# EAGLE board ADC_Block_Giant_Panel_v20 (EAGLE 7.3.0), part 1 of 13
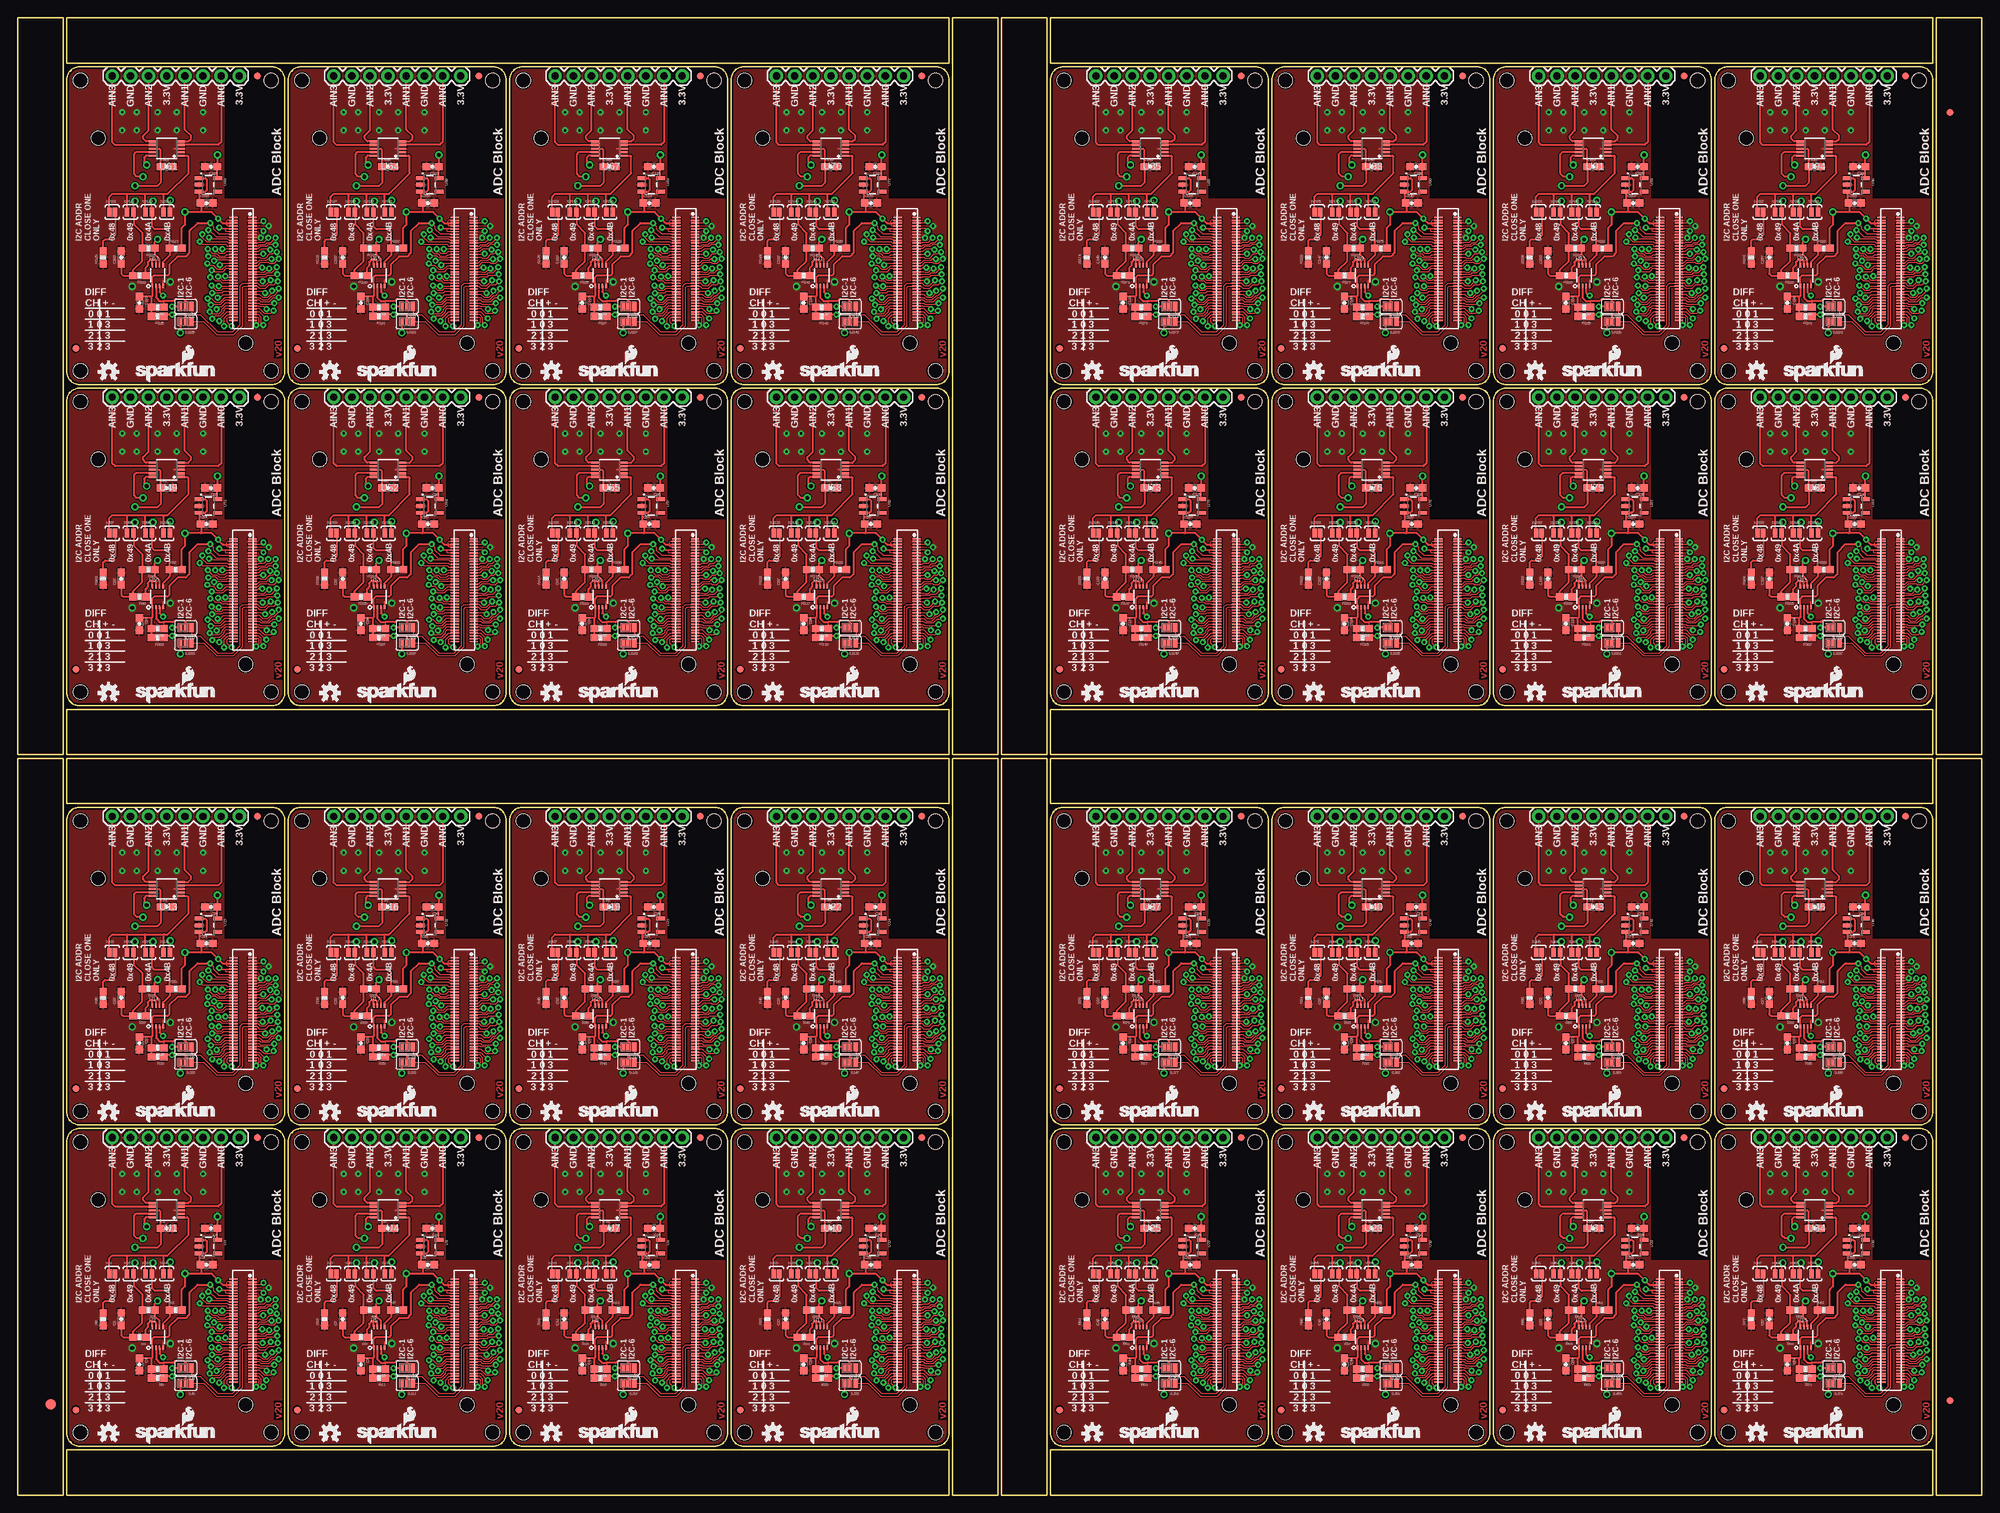
[diagram p0: board, top side]
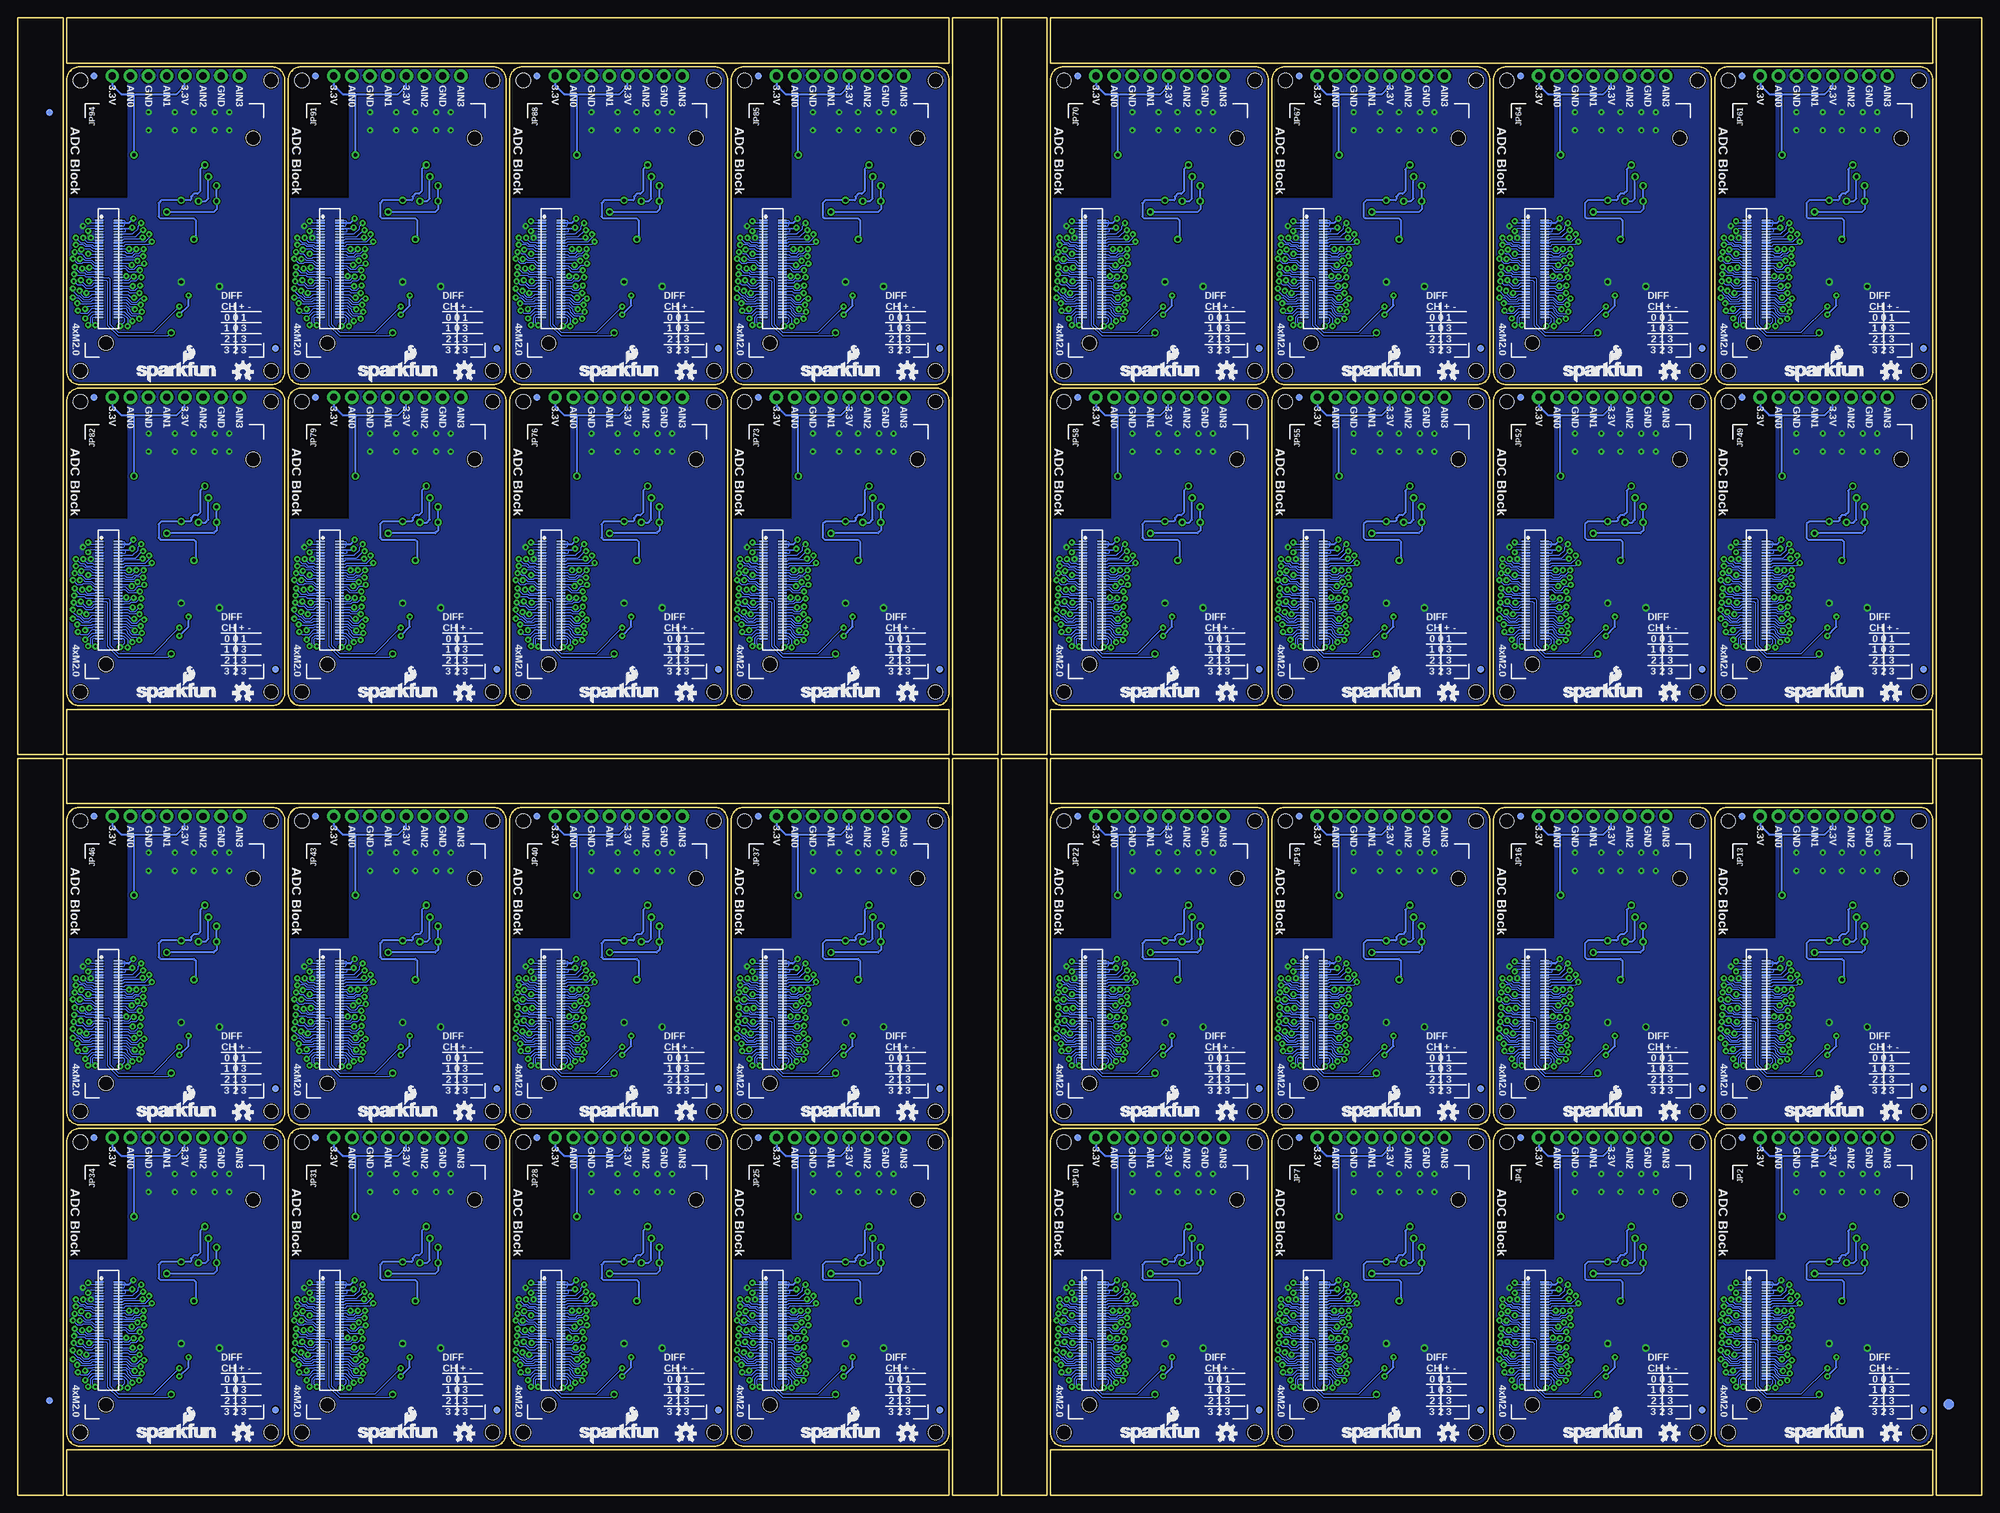
[diagram p1: board, bottom side, seen from below]

Size 274.83 x 206.76 mm. Coordinates in mm from the lower left corner, seen from the top.
Outline: 336 segments
Copper layers (1*16): Top 0.035mm / dielectric 1.5mm / Bottom 0.035mm
Design rules "SparkFun-2-layer *": minimum track width 6mil, minimum drill 13mil, track to track 6mil, track to pad 6mil, pad to pad 6mil, via to via 6mil, smd to smd 6mil, copper to edge 8mil, drill to drill 8mil, minimum pad ring 6mil, minimum via ring 10mil, stop-mask expansion 4mil, vias tented up to drill 20mil, thermal gap 8mil
Holes 2 mm at 35.43,8.76 8.76,8.76 8.76,49.4 35.43,49.4 66.42,8.76 39.75,8.76 39.75,49.4 66.42,49.4 97.41,8.76 70.74,8.76 70.74,49.4 97.41,49.4 128.4,8.76 101.73,8.76 101.73,49.4 128.4,49.4 35.43,53.72 8.76,53.72 8.76,94.36 35.43,94.36 66.42,53.72 39.75,53.72 39.75,94.36 66.42,94.36 97.41,53.72 70.74,53.72 70.74,94.36 97.41,94.36 128.4,53.72 101.73,53.72 101.73,94.36 128.4,94.36 173.1,8.76 146.43,8.76 146.43,49.4 173.1,49.4 204.09,8.76 177.42,8.76 177.42,49.4 204.09,49.4 235.08,8.76 208.41,8.76 208.41,49.4 235.08,49.4 266.06,8.76 239.4,8.76 239.4,49.4 266.06,49.4 173.1,53.72 146.43,53.72 146.43,94.36 173.1,94.36 204.09,53.72 177.42,53.72 177.42,94.36 204.09,94.36 235.08,53.72 208.41,53.72 208.41,94.36 235.08,94.36 266.06,53.72 239.4,53.72 239.4,94.36 266.06,94.36 35.43,112.39 8.76,112.39 8.76,153.03 35.43,153.03 66.42,112.39 39.75,112.39 39.75,153.03 66.42,153.03 97.41,112.39 70.74,112.39 70.74,153.03 97.41,153.03 128.4,112.39 101.73,112.39 101.73,153.03 128.4,153.03 35.43,157.35 8.76,157.35 8.76,197.99 35.43,197.99 66.42,157.35 39.75,157.35 39.75,197.99 66.42,197.99 97.41,157.35 70.74,157.35 70.74,197.99 97.41,197.99 128.4,157.35 101.73,157.35 101.73,197.99 128.4,197.99 173.1,112.39 146.43,112.39 146.43,153.03 173.1,153.03 204.09,112.39 177.42,112.39 177.42,153.03 204.09,153.03 235.08,112.39 208.41,112.39 208.41,153.03 235.08,153.03 266.06,112.39 239.4,112.39 239.4,153.03 266.06,153.03 173.1,157.35 146.43,157.35 146.43,197.99 173.1,197.99 204.09,157.35 177.42,157.35 177.42,197.99 204.09,197.99 235.08,157.35 208.41,157.35 208.41,197.99 235.08,197.99 266.06,157.35 239.4,157.35 239.4,197.99 266.06,197.99
tRestrict: area 29,33 to 37.3,51.3; area 59.9,33 to 68.3,51.3; area 90.9,33 to 99.3,51.3; area 121.9,33 to 130.3,51.3; area 29,78 to 37.3,96.3; area 59.9,78 to 68.3,96.3; area 90.9,78 to 99.3,96.3; area 121.9,78 to 130.3,96.3; area 166.6,33 to 175,51.3; area 197.6,33 to 206,51.3; area 228.6,33 to 237,51.3; area 259.6,33 to 268,51.3; 20 more areas; 64 lines
bRestrict: area 29,33 to 37.3,51.3; area 59.9,33 to 68.3,51.3; area 90.9,33 to 99.3,51.3; area 121.9,33 to 130.3,51.3; area 29,78 to 37.3,96.3; area 59.9,78 to 68.3,96.3; area 90.9,78 to 99.3,96.3; area 121.9,78 to 130.3,96.3; area 166.6,33 to 175,51.3; area 197.6,33 to 206,51.3; area 228.6,33 to 237,51.3; area 259.6,33 to 268,51.3; 20 more areas

## Footprints (pad centres in the part's own frame; a part is rotated, then mirrored left to right if it is on the bottom)
0603-CAP = smd 1.1 x 1: 1 -0.85,0; 2 0.85,0
FIDUCIAL-1.5X3 = smd 1.5 x 1.5: 1 0,0
FIDUCIAL-1X2 = smd 1 x 1: 1 0,0
1X08_ROUND = drill 1.016 pad 1.88: 1 0,0; 2 2.54,0; 3 5.08,0; 4 7.62,0; 5 10.16,0; 6 12.7,0; 7 15.24,0; 8 17.78,0
EDISON_DAUGHTER = smd 1.14 x 0.2: 1 1.98,19.17; 2 4.62,19.17; 3 1.98,18.77; 4 4.62,18.77; 5 1.98,18.37; 6 4.62,18.37; 7 1.98,17.97; 8 4.62,17.97; 9 1.98,17.57; 10 4.62,17.57; 11 1.98,17.17; 12 4.62,17.17; 13 1.98,16.77; 14 4.62,16.77; 15 1.98,16.37; 16 4.62,16.37; 17 1.98,15.97; 18 4.62,15.97; 19 1.98,15.57; 20 4.62,15.57; 21 1.98,15.17; 22 4.62,15.17; 23 1.98,14.77; 24 4.62,14.77; 25 1.98,14.37; 26 4.62,14.37; 27 1.98,13.97; 28 4.62,13.97; 29 1.98,13.57; 30 4.62,13.57; 31 1.98,13.17; 32 4.62,13.17; 33 1.98,12.77; 34 4.62,12.77; 35 1.98,12.37; 36 4.62,12.37; 37 1.98,11.97; 38 4.62,11.97; 39 1.98,11.57; 40 4.62,11.57; 41 1.98,11.17; 42 4.62,11.17; 43 1.98,10.77; 44 4.62,10.77; 45 1.98,10.37; 46 4.62,10.37; 47 1.98,9.97; 48 4.62,9.97; 49 1.98,9.57; 50 4.62,9.57; 51 1.98,9.17; 52 4.62,9.17; 53 1.98,8.77; 54 4.62,8.77; 55 1.98,8.37; 56 4.62,8.37; 57 1.98,7.97; 58 4.62,7.97; 59 1.98,7.57; 60 4.62,7.57; 61 1.98,7.17; 62 4.62,7.17; 63 1.98,6.77; 64 4.62,6.77; 65 1.98,6.37; 66 4.62,6.37; 67 1.98,5.97; 68 4.62,5.97; 69 1.98,5.57; 70 4.62,5.57 | hole 2: 23.53,30.67; 2.93,1.98
DF40C-70DP-0.4(51) = smd 0.2 x 1.14 bottom: 1 6.8,1.32; 2 6.8,-1.32; 3 6.4,1.32; 4 6.4,-1.32; 5 6,1.32; 6 6,-1.32; 7 5.6,1.32; 8 5.6,-1.32; 9 5.2,1.32; 10 5.2,-1.32; 11 4.8,1.32; 12 4.8,-1.32; 13 4.4,1.32; 14 4.4,-1.32; 15 4,1.32; 16 4,-1.32; 17 3.6,1.32; 18 3.6,-1.32; 19 3.2,1.32; 20 3.2,-1.32; 21 2.8,1.32; 22 2.8,-1.32; 23 2.4,1.32; 24 2.4,-1.32; 25 2,1.32; 26 2,-1.32; 27 1.6,1.32; 28 1.6,-1.32; 29 1.2,1.32; 30 1.2,-1.32; 31 0.8,1.32; 32 0.8,-1.32; 33 0.4,1.32; 34 0.4,-1.32; 35 0,1.32; 36 0,-1.32; 37 -0.4,1.32; 38 -0.4,-1.32; 39 -0.8,1.32; 40 -0.8,-1.32; 41 -1.2,1.32; 42 -1.2,-1.32; 43 -1.6,1.32; 44 -1.6,-1.32; 45 -2,1.32; 46 -2,-1.32; 47 -2.4,1.32; 48 -2.4,-1.32; 49 -2.8,1.32; 50 -2.8,-1.32; 51 -3.2,1.32; 52 -3.2,-1.32; 53 -3.6,1.32; 54 -3.6,-1.32; 55 -4,1.32; 56 -4,-1.32; 57 -4.4,1.32; 58 -4.4,-1.32; 59 -4.8,1.32; 60 -4.8,-1.32; 61 -5.2,1.32; 62 -5.2,-1.32; 63 -5.6,1.32; 64 -5.6,-1.32; 65 -6,1.32; 66 -6,-1.32; 67 -6.4,1.32; 68 -6.4,-1.32; 69 -6.8,1.32; 70 -6.8,-1.32; NC1 7.2,1.32; NC2 7.2,-1.32; NC3 -7.2,-1.32; NC4 -7.2,1.32
0603-RES = smd 1.1 x 1: 1 -0.85,0; 2 0.85,0
PAD-JUMPER-2-NC_BY_PASTE_YES_SILK = smd 0.635 x 1.27: 1 -0.401,0; 2 0.413,0
PAD-JUMPER-2-NO_YES_SILK = smd 0.635 x 1.27: 1 -0.45,0; 2 0.45,0
PAD-JUMPER-3-2OF3_NC_BY_PASTE_YES_SILK_FULL_BOX = smd 0.635 x 1.27: 1 -0.813,0; 2 0,0; 3 0.813,0
MSOP10 = smd 0.3 x 1: 1 -1,-2.05; 2 -0.5,-2.05; 3 0,-2.05; 4 0.5,-2.05; 5 1,-2.05; 6 1,2.05; 7 0.5,2.05; 8 0,2.05; 9 -0.5,2.05; 10 -1,2.05
PCA9306DC-1:1 = smd 0.25 x 0.602: 1 -0.73,-1.446; 2 -0.23,-1.446; 3 0.27,-1.446; 4 0.77,-1.446; 5 0.77,1.431; 6 0.27,1.431; 7 -0.23,1.431; 8 -0.73,1.431
SOT23-5 = smd 0.55 x 1.2: 1 -0.95,-1.3; 2 0,-1.3; 3 0.95,-1.3; 4 0.95,1.3; 5 -0.95,1.3

## Placement (x,y rotation side)
C1  0.1uF  [0603-CAP]  20.83,37.34 0 top
C2  0.1uF  [0603-CAP]  14.48,24.64 90 top
C3  0.1uF  [0603-CAP]  17.02,18.29 270 top
C4  0.1uF  [0603-CAP]  26.42,32.26 0 top
C5  2.2uF  [0603-CAP]  27.05,37.34 180 top
C6  0.1uF  [0603-CAP]  51.82,37.34 0 top
C7  0.1uF  [0603-CAP]  45.47,24.64 90 top
C8  0.1uF  [0603-CAP]  48.01,18.29 270 top
C9  0.1uF  [0603-CAP]  57.4,32.26 0 top
C10  2.2uF  [0603-CAP]  58.04,37.34 180 top
C11  0.1uF  [0603-CAP]  82.8,37.34 0 top
C12  0.1uF  [0603-CAP]  76.45,24.64 90 top
C13  0.1uF  [0603-CAP]  78.99,18.29 270 top
C14  0.1uF  [0603-CAP]  88.39,32.26 0 top
C15  2.2uF  [0603-CAP]  89.03,37.34 180 top
C16  0.1uF  [0603-CAP]  113.79,37.34 0 top
C17  0.1uF  [0603-CAP]  107.44,24.64 90 top
C18  0.1uF  [0603-CAP]  109.98,18.29 270 top
C19  0.1uF  [0603-CAP]  119.38,32.26 0 top
C20  2.2uF  [0603-CAP]  120.02,37.34 180 top
C21  0.1uF  [0603-CAP]  20.83,82.3 0 top
C22  0.1uF  [0603-CAP]  14.48,69.6 90 top
C23  0.1uF  [0603-CAP]  17.02,63.25 270 top
C24  0.1uF  [0603-CAP]  26.42,77.22 0 top
C25  2.2uF  [0603-CAP]  27.05,82.3 180 top
C26  0.1uF  [0603-CAP]  51.82,82.3 0 top
C27  0.1uF  [0603-CAP]  45.47,69.6 90 top
C28  0.1uF  [0603-CAP]  48.01,63.25 270 top
C29  0.1uF  [0603-CAP]  57.4,77.22 0 top
C30  2.2uF  [0603-CAP]  58.04,82.3 180 top
C31  0.1uF  [0603-CAP]  82.8,82.3 0 top
C32  0.1uF  [0603-CAP]  76.45,69.6 90 top
C33  0.1uF  [0603-CAP]  78.99,63.25 270 top
C34  0.1uF  [0603-CAP]  88.39,77.22 0 top
C35  2.2uF  [0603-CAP]  89.03,82.3 180 top
C36  0.1uF  [0603-CAP]  113.79,82.3 0 top
C37  0.1uF  [0603-CAP]  107.44,69.6 90 top
C38  0.1uF  [0603-CAP]  109.98,63.25 270 top
C39  0.1uF  [0603-CAP]  119.38,77.22 0 top
C40  2.2uF  [0603-CAP]  120.02,82.3 180 top
C41  0.1uF  [0603-CAP]  158.5,37.34 0 top
C42  0.1uF  [0603-CAP]  152.15,24.64 90 top
C43  0.1uF  [0603-CAP]  154.69,18.29 270 top
C44  0.1uF  [0603-CAP]  164.08,32.26 0 top
C45  2.2uF  [0603-CAP]  164.72,37.34 180 top
C46  0.1uF  [0603-CAP]  189.48,37.34 0 top
C47  0.1uF  [0603-CAP]  183.13,24.64 90 top
C48  0.1uF  [0603-CAP]  185.67,18.29 270 top
C49  0.1uF  [0603-CAP]  195.07,32.26 0 top
C50  2.2uF  [0603-CAP]  195.71,37.34 180 top
C51  0.1uF  [0603-CAP]  220.47,37.34 0 top
C52  0.1uF  [0603-CAP]  214.12,24.64 90 top
C53  0.1uF  [0603-CAP]  216.66,18.29 270 top
C54  0.1uF  [0603-CAP]  226.06,32.26 0 top
C55  2.2uF  [0603-CAP]  226.69,37.34 180 top
C56  0.1uF  [0603-CAP]  251.46,37.34 0 top
C57  0.1uF  [0603-CAP]  245.11,24.64 90 top
C58  0.1uF  [0603-CAP]  247.65,18.29 270 top
C59  0.1uF  [0603-CAP]  257.05,32.26 0 top
C60  2.2uF  [0603-CAP]  257.68,37.34 180 top
C61  0.1uF  [0603-CAP]  158.5,82.3 0 top
C62  0.1uF  [0603-CAP]  152.15,69.6 90 top
C63  0.1uF  [0603-CAP]  154.69,63.25 270 top
C64  0.1uF  [0603-CAP]  164.08,77.22 0 top
C65  2.2uF  [0603-CAP]  164.72,82.3 180 top
C66  0.1uF  [0603-CAP]  189.48,82.3 0 top
C67  0.1uF  [0603-CAP]  183.13,69.6 90 top
C68  0.1uF  [0603-CAP]  185.67,63.25 270 top
C69  0.1uF  [0603-CAP]  195.07,77.22 0 top
C70  2.2uF  [0603-CAP]  195.71,82.3 180 top
C71  0.1uF  [0603-CAP]  220.47,82.3 0 top
C72  0.1uF  [0603-CAP]  214.12,69.6 90 top
C73  0.1uF  [0603-CAP]  216.66,63.25 270 top
C74  0.1uF  [0603-CAP]  226.06,77.22 0 top
C75  2.2uF  [0603-CAP]  226.69,82.3 180 top
C76  0.1uF  [0603-CAP]  251.46,82.3 0 top
C77  0.1uF  [0603-CAP]  245.11,69.6 90 top
C78  0.1uF  [0603-CAP]  247.65,63.25 270 top
C79  0.1uF  [0603-CAP]  257.05,77.22 0 top
C80  2.2uF  [0603-CAP]  257.68,82.3 180 top
C81  0.1uF  [0603-CAP]  20.83,140.97 0 top
C82  0.1uF  [0603-CAP]  14.48,128.27 90 top
C83  0.1uF  [0603-CAP]  17.02,121.92 270 top
C84  0.1uF  [0603-CAP]  26.42,135.89 0 top
C85  2.2uF  [0603-CAP]  27.05,140.97 180 top
C86  0.1uF  [0603-CAP]  51.82,140.97 0 top
C87  0.1uF  [0603-CAP]  45.47,128.27 90 top
C88  0.1uF  [0603-CAP]  48.01,121.92 270 top
C89  0.1uF  [0603-CAP]  57.4,135.89 0 top
C90  2.2uF  [0603-CAP]  58.04,140.97 180 top
C91  0.1uF  [0603-CAP]  82.8,140.97 0 top
C92  0.1uF  [0603-CAP]  76.45,128.27 90 top
C93  0.1uF  [0603-CAP]  78.99,121.92 270 top
C94  0.1uF  [0603-CAP]  88.39,135.89 0 top
C95  2.2uF  [0603-CAP]  89.03,140.97 180 top
C96  0.1uF  [0603-CAP]  113.79,140.97 0 top
C97  0.1uF  [0603-CAP]  107.44,128.27 90 top
C98  0.1uF  [0603-CAP]  109.98,121.92 270 top
C99  0.1uF  [0603-CAP]  119.38,135.89 0 top
C100  2.2uF  [0603-CAP]  120.02,140.97 180 top
C101  0.1uF  [0603-CAP]  20.83,185.93 0 top
C102  0.1uF  [0603-CAP]  14.48,173.23 90 top
C103  0.1uF  [0603-CAP]  17.02,166.88 270 top
C104  0.1uF  [0603-CAP]  26.42,180.85 0 top
C105  2.2uF  [0603-CAP]  27.05,185.93 180 top
C106  0.1uF  [0603-CAP]  51.82,185.93 0 top
C107  0.1uF  [0603-CAP]  45.47,173.23 90 top
C108  0.1uF  [0603-CAP]  48.01,166.88 270 top
C109  0.1uF  [0603-CAP]  57.4,180.85 0 top
C110  2.2uF  [0603-CAP]  58.04,185.93 180 top
C111  0.1uF  [0603-CAP]  82.8,185.93 0 top
C112  0.1uF  [0603-CAP]  76.45,173.23 90 top
C113  0.1uF  [0603-CAP]  78.99,166.88 270 top
C114  0.1uF  [0603-CAP]  88.39,180.85 0 top
C115  2.2uF  [0603-CAP]  89.03,185.93 180 top
C116  0.1uF  [0603-CAP]  113.79,185.93 0 top
C117  0.1uF  [0603-CAP]  107.44,173.23 90 top
C118  0.1uF  [0603-CAP]  109.98,166.88 270 top
C119  0.1uF  [0603-CAP]  119.38,180.85 0 top
C120  2.2uF  [0603-CAP]  120.02,185.93 180 top
C121  0.1uF  [0603-CAP]  158.5,140.97 0 top
C122  0.1uF  [0603-CAP]  152.15,128.27 90 top
C123  0.1uF  [0603-CAP]  154.69,121.92 270 top
C124  0.1uF  [0603-CAP]  164.08,135.89 0 top
C125  2.2uF  [0603-CAP]  164.72,140.97 180 top
C126  0.1uF  [0603-CAP]  189.48,140.97 0 top
C127  0.1uF  [0603-CAP]  183.13,128.27 90 top
C128  0.1uF  [0603-CAP]  185.67,121.92 270 top
C129  0.1uF  [0603-CAP]  195.07,135.89 0 top
C130  2.2uF  [0603-CAP]  195.71,140.97 180 top
C131  0.1uF  [0603-CAP]  220.47,140.97 0 top
C132  0.1uF  [0603-CAP]  214.12,128.27 90 top
C133  0.1uF  [0603-CAP]  216.66,121.92 270 top
C134  0.1uF  [0603-CAP]  226.06,135.89 0 top
C135  2.2uF  [0603-CAP]  226.69,140.97 180 top
C136  0.1uF  [0603-CAP]  251.46,140.97 0 top
C137  0.1uF  [0603-CAP]  245.11,128.27 90 top
C138  0.1uF  [0603-CAP]  247.65,121.92 270 top
C139  0.1uF  [0603-CAP]  257.05,135.89 0 top
C140  2.2uF  [0603-CAP]  257.68,140.97 180 top
C141  0.1uF  [0603-CAP]  158.5,185.93 0 top
C142  0.1uF  [0603-CAP]  152.15,173.23 90 top
C143  0.1uF  [0603-CAP]  154.69,166.88 270 top
C144  0.1uF  [0603-CAP]  164.08,180.85 0 top
C145  2.2uF  [0603-CAP]  164.72,185.93 180 top
C146  0.1uF  [0603-CAP]  189.48,185.93 0 top
C147  0.1uF  [0603-CAP]  183.13,173.23 90 top
C148  0.1uF  [0603-CAP]  185.67,166.88 270 top
C149  0.1uF  [0603-CAP]  195.07,180.85 0 top
C150  2.2uF  [0603-CAP]  195.71,185.93 180 top
C151  0.1uF  [0603-CAP]  220.47,185.93 0 top
C152  0.1uF  [0603-CAP]  214.12,173.23 90 top
C153  0.1uF  [0603-CAP]  216.66,166.88 270 top
C154  0.1uF  [0603-CAP]  226.06,180.85 0 top
C155  2.2uF  [0603-CAP]  226.69,185.93 180 top
C156  0.1uF  [0603-CAP]  251.46,185.93 0 top
C157  0.1uF  [0603-CAP]  245.11,173.23 90 top
C158  0.1uF  [0603-CAP]  247.65,166.88 270 top
C159  0.1uF  [0603-CAP]  257.05,180.85 0 top
C160  2.2uF  [0603-CAP]  257.68,185.93 180 top
E$1  [FIDUCIAL-1.5X3]  4.57,12.7 0 top
E$2  [FIDUCIAL-1X2]  270.38,13.21 0 top
E$3  [FIDUCIAL-1.5X3]  4.57,12.7 0 bottom
E$4  [FIDUCIAL-1X2]  270.38,13.21 0 bottom
E$5  [FIDUCIAL-1X2]  270.38,193.55 180 bottom
E$11  [FIDUCIAL-1X2]  270.38,193.55 180 top
FID1  FIDUCIAL1X2  [FIDUCIAL-1X2]  8.13,11.94 0 top
FID2  FIDUCIAL1X2  [FIDUCIAL-1X2]  33.53,50.04 0 top
FID3  FIDUCIAL1X2  [FIDUCIAL-1X2]  33.53,50.04 0 bottom
FID4  FIDUCIAL1X2  [FIDUCIAL-1X2]  8.13,11.94 0 bottom
FID5  FIDUCIAL1X2  [FIDUCIAL-1X2]  39.12,11.94 0 top
FID6  FIDUCIAL1X2  [FIDUCIAL-1X2]  64.52,50.04 0 top
FID7  FIDUCIAL1X2  [FIDUCIAL-1X2]  64.52,50.04 0 bottom
FID8  FIDUCIAL1X2  [FIDUCIAL-1X2]  39.12,11.94 0 bottom
FID9  FIDUCIAL1X2  [FIDUCIAL-1X2]  70.1,11.94 0 top
FID10  FIDUCIAL1X2  [FIDUCIAL-1X2]  95.5,50.04 0 top
FID11  FIDUCIAL1X2  [FIDUCIAL-1X2]  95.5,50.04 0 bottom
FID12  FIDUCIAL1X2  [FIDUCIAL-1X2]  70.1,11.94 0 bottom
FID13  FIDUCIAL1X2  [FIDUCIAL-1X2]  101.09,11.94 0 top
FID14  FIDUCIAL1X2  [FIDUCIAL-1X2]  126.49,50.04 0 top
FID15  FIDUCIAL1X2  [FIDUCIAL-1X2]  126.49,50.04 0 bottom
FID16  FIDUCIAL1X2  [FIDUCIAL-1X2]  101.09,11.94 0 bottom
FID17  FIDUCIAL1X2  [FIDUCIAL-1X2]  8.13,56.9 0 top
FID18  FIDUCIAL1X2  [FIDUCIAL-1X2]  33.53,95 0 top
FID19  FIDUCIAL1X2  [FIDUCIAL-1X2]  33.53,95 0 bottom
FID20  FIDUCIAL1X2  [FIDUCIAL-1X2]  8.13,56.9 0 bottom
FID21  FIDUCIAL1X2  [FIDUCIAL-1X2]  39.12,56.9 0 top
FID22  FIDUCIAL1X2  [FIDUCIAL-1X2]  64.52,95 0 top
FID23  FIDUCIAL1X2  [FIDUCIAL-1X2]  64.52,95 0 bottom
FID24  FIDUCIAL1X2  [FIDUCIAL-1X2]  39.12,56.9 0 bottom
FID25  FIDUCIAL1X2  [FIDUCIAL-1X2]  70.1,56.9 0 top
FID26  FIDUCIAL1X2  [FIDUCIAL-1X2]  95.5,95 0 top
FID27  FIDUCIAL1X2  [FIDUCIAL-1X2]  95.5,95 0 bottom
FID28  FIDUCIAL1X2  [FIDUCIAL-1X2]  70.1,56.9 0 bottom
FID29  FIDUCIAL1X2  [FIDUCIAL-1X2]  101.09,56.9 0 top
FID30  FIDUCIAL1X2  [FIDUCIAL-1X2]  126.49,95 0 top
FID31  FIDUCIAL1X2  [FIDUCIAL-1X2]  126.49,95 0 bottom
FID32  FIDUCIAL1X2  [FIDUCIAL-1X2]  101.09,56.9 0 bottom
FID33  FIDUCIAL1X2  [FIDUCIAL-1X2]  145.8,11.94 0 top
FID34  FIDUCIAL1X2  [FIDUCIAL-1X2]  171.2,50.04 0 top
FID35  FIDUCIAL1X2  [FIDUCIAL-1X2]  171.2,50.04 0 bottom
FID36  FIDUCIAL1X2  [FIDUCIAL-1X2]  145.8,11.94 0 bottom
FID37  FIDUCIAL1X2  [FIDUCIAL-1X2]  176.78,11.94 0 top
FID38  FIDUCIAL1X2  [FIDUCIAL-1X2]  202.18,50.04 0 top
FID39  FIDUCIAL1X2  [FIDUCIAL-1X2]  202.18,50.04 0 bottom
FID40  FIDUCIAL1X2  [FIDUCIAL-1X2]  176.78,11.94 0 bottom
FID41  FIDUCIAL1X2  [FIDUCIAL-1X2]  207.77,11.94 0 top
FID42  FIDUCIAL1X2  [FIDUCIAL-1X2]  233.17,50.04 0 top
FID43  FIDUCIAL1X2  [FIDUCIAL-1X2]  233.17,50.04 0 bottom
FID44  FIDUCIAL1X2  [FIDUCIAL-1X2]  207.77,11.94 0 bottom
FID45  FIDUCIAL1X2  [FIDUCIAL-1X2]  238.76,11.94 0 top
FID46  FIDUCIAL1X2  [FIDUCIAL-1X2]  264.16,50.04 0 top
FID47  FIDUCIAL1X2  [FIDUCIAL-1X2]  264.16,50.04 0 bottom
FID48  FIDUCIAL1X2  [FIDUCIAL-1X2]  238.76,11.94 0 bottom
FID49  FIDUCIAL1X2  [FIDUCIAL-1X2]  145.8,56.9 0 top
FID50  FIDUCIAL1X2  [FIDUCIAL-1X2]  171.2,95 0 top
FID51  FIDUCIAL1X2  [FIDUCIAL-1X2]  171.2,95 0 bottom
FID52  FIDUCIAL1X2  [FIDUCIAL-1X2]  145.8,56.9 0 bottom
FID53  FIDUCIAL1X2  [FIDUCIAL-1X2]  176.78,56.9 0 top
FID54  FIDUCIAL1X2  [FIDUCIAL-1X2]  202.18,95 0 top
FID55  FIDUCIAL1X2  [FIDUCIAL-1X2]  202.18,95 0 bottom
FID56  FIDUCIAL1X2  [FIDUCIAL-1X2]  176.78,56.9 0 bottom
FID57  FIDUCIAL1X2  [FIDUCIAL-1X2]  207.77,56.9 0 top
FID58  FIDUCIAL1X2  [FIDUCIAL-1X2]  233.17,95 0 top
FID59  FIDUCIAL1X2  [FIDUCIAL-1X2]  233.17,95 0 bottom
FID60  FIDUCIAL1X2  [FIDUCIAL-1X2]  207.77,56.9 0 bottom
FID61  FIDUCIAL1X2  [FIDUCIAL-1X2]  238.76,56.9 0 top
FID62  FIDUCIAL1X2  [FIDUCIAL-1X2]  264.16,95 0 top
FID63  FIDUCIAL1X2  [FIDUCIAL-1X2]  264.16,95 0 bottom
FID64  FIDUCIAL1X2  [FIDUCIAL-1X2]  238.76,56.9 0 bottom
FID65  FIDUCIAL1X2  [FIDUCIAL-1X2]  8.13,115.57 0 top
FID66  FIDUCIAL1X2  [FIDUCIAL-1X2]  33.53,153.67 0 top
FID67  FIDUCIAL1X2  [FIDUCIAL-1X2]  33.53,153.67 0 bottom
FID68  FIDUCIAL1X2  [FIDUCIAL-1X2]  8.13,115.57 0 bottom
FID69  FIDUCIAL1X2  [FIDUCIAL-1X2]  39.12,115.57 0 top
FID70  FIDUCIAL1X2  [FIDUCIAL-1X2]  64.52,153.67 0 top
FID71  FIDUCIAL1X2  [FIDUCIAL-1X2]  64.52,153.67 0 bottom
FID72  FIDUCIAL1X2  [FIDUCIAL-1X2]  39.12,115.57 0 bottom
FID73  FIDUCIAL1X2  [FIDUCIAL-1X2]  70.1,115.57 0 top
FID74  FIDUCIAL1X2  [FIDUCIAL-1X2]  95.5,153.67 0 top
FID75  FIDUCIAL1X2  [FIDUCIAL-1X2]  95.5,153.67 0 bottom
FID76  FIDUCIAL1X2  [FIDUCIAL-1X2]  70.1,115.57 0 bottom
FID77  FIDUCIAL1X2  [FIDUCIAL-1X2]  101.09,115.57 0 top
FID78  FIDUCIAL1X2  [FIDUCIAL-1X2]  126.49,153.67 0 top
FID79  FIDUCIAL1X2  [FIDUCIAL-1X2]  126.49,153.67 0 bottom
FID80  FIDUCIAL1X2  [FIDUCIAL-1X2]  101.09,115.57 0 bottom
FID81  FIDUCIAL1X2  [FIDUCIAL-1X2]  8.13,160.53 0 top
FID82  FIDUCIAL1X2  [FIDUCIAL-1X2]  33.53,198.63 0 top
FID83  FIDUCIAL1X2  [FIDUCIAL-1X2]  33.53,198.63 0 bottom
FID84  FIDUCIAL1X2  [FIDUCIAL-1X2]  8.13,160.53 0 bottom
FID85  FIDUCIAL1X2  [FIDUCIAL-1X2]  39.12,160.53 0 top
FID86  FIDUCIAL1X2  [FIDUCIAL-1X2]  64.52,198.63 0 top
FID87  FIDUCIAL1X2  [FIDUCIAL-1X2]  64.52,198.63 0 bottom
FID88  FIDUCIAL1X2  [FIDUCIAL-1X2]  39.12,160.53 0 bottom
FID89  FIDUCIAL1X2  [FIDUCIAL-1X2]  70.1,160.53 0 top
FID90  FIDUCIAL1X2  [FIDUCIAL-1X2]  95.5,198.63 0 top
FID91  FIDUCIAL1X2  [FIDUCIAL-1X2]  95.5,198.63 0 bottom
FID92  FIDUCIAL1X2  [FIDUCIAL-1X2]  70.1,160.53 0 bottom
FID93  FIDUCIAL1X2  [FIDUCIAL-1X2]  101.09,160.53 0 top
FID94  FIDUCIAL1X2  [FIDUCIAL-1X2]  126.49,198.63 0 top
FID95  FIDUCIAL1X2  [FIDUCIAL-1X2]  126.49,198.63 0 bottom
FID96  FIDUCIAL1X2  [FIDUCIAL-1X2]  101.09,160.53 0 bottom
FID97  FIDUCIAL1X2  [FIDUCIAL-1X2]  145.8,115.57 0 top
FID98  FIDUCIAL1X2  [FIDUCIAL-1X2]  171.2,153.67 0 top
FID99  FIDUCIAL1X2  [FIDUCIAL-1X2]  171.2,153.67 0 bottom
FID100  FIDUCIAL1X2  [FIDUCIAL-1X2]  145.8,115.57 0 bottom
FID101  FIDUCIAL1X2  [FIDUCIAL-1X2]  176.78,115.57 0 top
FID102  FIDUCIAL1X2  [FIDUCIAL-1X2]  202.18,153.67 0 top
FID103  FIDUCIAL1X2  [FIDUCIAL-1X2]  202.18,153.67 0 bottom
FID104  FIDUCIAL1X2  [FIDUCIAL-1X2]  176.78,115.57 0 bottom
FID105  FIDUCIAL1X2  [FIDUCIAL-1X2]  207.77,115.57 0 top
FID106  FIDUCIAL1X2  [FIDUCIAL-1X2]  233.17,153.67 0 top
FID107  FIDUCIAL1X2  [FIDUCIAL-1X2]  233.17,153.67 0 bottom
FID108  FIDUCIAL1X2  [FIDUCIAL-1X2]  207.77,115.57 0 bottom
FID109  FIDUCIAL1X2  [FIDUCIAL-1X2]  238.76,115.57 0 top
FID110  FIDUCIAL1X2  [FIDUCIAL-1X2]  264.16,153.67 0 top
FID111  FIDUCIAL1X2  [FIDUCIAL-1X2]  264.16,153.67 0 bottom
FID112  FIDUCIAL1X2  [FIDUCIAL-1X2]  238.76,115.57 0 bottom
FID113  FIDUCIAL1X2  [FIDUCIAL-1X2]  145.8,160.53 0 top
FID114  FIDUCIAL1X2  [FIDUCIAL-1X2]  171.2,198.63 0 top
FID115  FIDUCIAL1X2  [FIDUCIAL-1X2]  171.2,198.63 0 bottom
FID116  FIDUCIAL1X2  [FIDUCIAL-1X2]  145.8,160.53 0 bottom
FID117  FIDUCIAL1X2  [FIDUCIAL-1X2]  176.78,160.53 0 top
FID118  FIDUCIAL1X2  [FIDUCIAL-1X2]  202.18,198.63 0 top
FID119  FIDUCIAL1X2  [FIDUCIAL-1X2]  202.18,198.63 0 bottom
FID120  FIDUCIAL1X2  [FIDUCIAL-1X2]  176.78,160.53 0 bottom
FID121  FIDUCIAL1X2  [FIDUCIAL-1X2]  207.77,160.53 0 top
FID122  FIDUCIAL1X2  [FIDUCIAL-1X2]  233.17,198.63 0 top
FID123  FIDUCIAL1X2  [FIDUCIAL-1X2]  233.17,198.63 0 bottom
FID124  FIDUCIAL1X2  [FIDUCIAL-1X2]  207.77,160.53 0 bottom
FID125  FIDUCIAL1X2  [FIDUCIAL-1X2]  238.76,160.53 0 top
FID126  FIDUCIAL1X2  [FIDUCIAL-1X2]  264.16,198.63 0 top
FID127  FIDUCIAL1X2  [FIDUCIAL-1X2]  264.16,198.63 0 bottom
FID128  FIDUCIAL1X2  [FIDUCIAL-1X2]  238.76,160.53 0 bottom
JP1  [1X08_ROUND]  13.21,50.04 0 top
JP2  EDISON_CONNECTOR_FULLMOUNTING_HOLES  [EDISON_DAUGHTER]  34.8,10.67 0 bottom
JP3  EDISON_CONNECTOR_FULLHEADER  [DF40C-70DP-0.4(51)]  31.5,23.04 90 bottom
JP4  EDISON_CONNECTOR_FULLMOUNTING_HOLES  [EDISON_DAUGHTER]  65.79,10.67 0 bottom
JP5  EDISON_CONNECTOR_FULLHEADER  [DF40C-70DP-0.4(51)]  62.49,23.04 90 bottom
JP6  [1X08_ROUND]  44.2,50.04 0 top
JP7  EDISON_CONNECTOR_FULLMOUNTING_HOLES  [EDISON_DAUGHTER]  96.77,10.67 0 bottom
JP8  EDISON_CONNECTOR_FULLHEADER  [DF40C-70DP-0.4(51)]  93.47,23.04 90 bottom
JP9  [1X08_ROUND]  75.18,50.04 0 top
JP10  EDISON_CONNECTOR_FULLMOUNTING_HOLES  [EDISON_DAUGHTER]  127.76,10.67 0 bottom
JP11  EDISON_CONNECTOR_FULLHEADER  [DF40C-70DP-0.4(51)]  124.46,23.04 90 bottom
JP12  [1X08_ROUND]  106.17,50.04 0 top
JP13  EDISON_CONNECTOR_FULLMOUNTING_HOLES  [EDISON_DAUGHTER]  34.8,55.63 0 bottom
JP14  EDISON_CONNECTOR_FULLHEADER  [DF40C-70DP-0.4(51)]  31.5,68 90 bottom
JP15  [1X08_ROUND]  13.21,95 0 top
JP16  EDISON_CONNECTOR_FULLMOUNTING_HOLES  [EDISON_DAUGHTER]  65.79,55.63 0 bottom
JP17  EDISON_CONNECTOR_FULLHEADER  [DF40C-70DP-0.4(51)]  62.49,68 90 bottom
JP18  [1X08_ROUND]  44.2,95 0 top
JP19  EDISON_CONNECTOR_FULLMOUNTING_HOLES  [EDISON_DAUGHTER]  96.77,55.63 0 bottom
JP20  EDISON_CONNECTOR_FULLHEADER  [DF40C-70DP-0.4(51)]  93.47,68 90 bottom
JP21  [1X08_ROUND]  75.18,95 0 top
JP22  EDISON_CONNECTOR_FULLMOUNTING_HOLES  [EDISON_DAUGHTER]  127.76,55.63 0 bottom
JP23  EDISON_CONNECTOR_FULLHEADER  [DF40C-70DP-0.4(51)]  124.46,68 90 bottom
JP24  [1X08_ROUND]  106.17,95 0 top
JP25  EDISON_CONNECTOR_FULLMOUNTING_HOLES  [EDISON_DAUGHTER]  172.47,10.67 0 bottom
JP26  EDISON_CONNECTOR_FULLHEADER  [DF40C-70DP-0.4(51)]  169.17,23.04 90 bottom
JP27  [1X08_ROUND]  150.88,50.04 0 top
JP28  EDISON_CONNECTOR_FULLMOUNTING_HOLES  [EDISON_DAUGHTER]  203.45,10.67 0 bottom
JP29  EDISON_CONNECTOR_FULLHEADER  [DF40C-70DP-0.4(51)]  200.15,23.04 90 bottom
JP30  [1X08_ROUND]  181.86,50.04 0 top
JP31  EDISON_CONNECTOR_FULLMOUNTING_HOLES  [EDISON_DAUGHTER]  234.44,10.67 0 bottom
JP32  EDISON_CONNECTOR_FULLHEADER  [DF40C-70DP-0.4(51)]  231.14,23.04 90 bottom
JP33  [1X08_ROUND]  212.85,50.04 0 top
JP34  EDISON_CONNECTOR_FULLMOUNTING_HOLES  [EDISON_DAUGHTER]  265.43,10.67 0 bottom
JP35  EDISON_CONNECTOR_FULLHEADER  [DF40C-70DP-0.4(51)]  262.13,23.04 90 bottom
JP36  [1X08_ROUND]  243.84,50.04 0 top
JP37  EDISON_CONNECTOR_FULLMOUNTING_HOLES  [EDISON_DAUGHTER]  172.47,55.63 0 bottom
JP38  EDISON_CONNECTOR_FULLHEADER  [DF40C-70DP-0.4(51)]  169.17,68 90 bottom
JP39  [1X08_ROUND]  150.88,95 0 top
JP40  EDISON_CONNECTOR_FULLMOUNTING_HOLES  [EDISON_DAUGHTER]  203.45,55.63 0 bottom
JP41  EDISON_CONNECTOR_FULLHEADER  [DF40C-70DP-0.4(51)]  200.15,68 90 bottom
JP42  [1X08_ROUND]  181.86,95 0 top
JP43  EDISON_CONNECTOR_FULLMOUNTING_HOLES  [EDISON_DAUGHTER]  234.44,55.63 0 bottom
JP44  EDISON_CONNECTOR_FULLHEADER  [DF40C-70DP-0.4(51)]  231.14,68 90 bottom
JP45  [1X08_ROUND]  212.85,95 0 top
JP46  EDISON_CONNECTOR_FULLMOUNTING_HOLES  [EDISON_DAUGHTER]  265.43,55.63 0 bottom
JP47  EDISON_CONNECTOR_FULLHEADER  [DF40C-70DP-0.4(51)]  262.13,68 90 bottom
JP48  [1X08_ROUND]  243.84,95 0 top
JP49  EDISON_CONNECTOR_FULLMOUNTING_HOLES  [EDISON_DAUGHTER]  34.8,114.3 0 bottom
JP50  EDISON_CONNECTOR_FULLHEADER  [DF40C-70DP-0.4(51)]  31.5,126.67 90 bottom
JP51  [1X08_ROUND]  13.21,153.67 0 top
JP52  EDISON_CONNECTOR_FULLMOUNTING_HOLES  [EDISON_DAUGHTER]  65.79,114.3 0 bottom
JP53  EDISON_CONNECTOR_FULLHEADER  [DF40C-70DP-0.4(51)]  62.49,126.67 90 bottom
JP54  [1X08_ROUND]  44.2,153.67 0 top
JP55  EDISON_CONNECTOR_FULLMOUNTING_HOLES  [EDISON_DAUGHTER]  96.77,114.3 0 bottom
JP56  EDISON_CONNECTOR_FULLHEADER  [DF40C-70DP-0.4(51)]  93.47,126.67 90 bottom
JP57  [1X08_ROUND]  75.18,153.67 0 top
JP58  EDISON_CONNECTOR_FULLMOUNTING_HOLES  [EDISON_DAUGHTER]  127.76,114.3 0 bottom
JP59  EDISON_CONNECTOR_FULLHEADER  [DF40C-70DP-0.4(51)]  124.46,126.67 90 bottom
JP60  [1X08_ROUND]  106.17,153.67 0 top
JP61  EDISON_CONNECTOR_FULLMOUNTING_HOLES  [EDISON_DAUGHTER]  34.8,159.26 0 bottom
JP62  EDISON_CONNECTOR_FULLHEADER  [DF40C-70DP-0.4(51)]  31.5,171.63 90 bottom
JP63  [1X08_ROUND]  13.21,198.63 0 top
JP64  EDISON_CONNECTOR_FULLMOUNTING_HOLES  [EDISON_DAUGHTER]  65.79,159.26 0 bottom
JP65  EDISON_CONNECTOR_FULLHEADER  [DF40C-70DP-0.4(51)]  62.49,171.63 90 bottom
JP66  [1X08_ROUND]  44.2,198.63 0 top
JP67  EDISON_CONNECTOR_FULLMOUNTING_HOLES  [EDISON_DAUGHTER]  96.77,159.26 0 bottom
JP68  EDISON_CONNECTOR_FULLHEADER  [DF40C-70DP-0.4(51)]  93.47,171.63 90 bottom
JP69  [1X08_ROUND]  75.18,198.63 0 top
JP70  EDISON_CONNECTOR_FULLMOUNTING_HOLES  [EDISON_DAUGHTER]  127.76,159.26 0 bottom
JP71  EDISON_CONNECTOR_FULLHEADER  [DF40C-70DP-0.4(51)]  124.46,171.63 90 bottom
JP72  [1X08_ROUND]  106.17,198.63 0 top
JP73  EDISON_CONNECTOR_FULLMOUNTING_HOLES  [EDISON_DAUGHTER]  172.47,114.3 0 bottom
JP74  EDISON_CONNECTOR_FULLHEADER  [DF40C-70DP-0.4(51)]  169.17,126.67 90 bottom
JP75  [1X08_ROUND]  150.88,153.67 0 top
JP76  EDISON_CONNECTOR_FULLMOUNTING_HOLES  [EDISON_DAUGHTER]  203.45,114.3 0 bottom
JP77  EDISON_CONNECTOR_FULLHEADER  [DF40C-70DP-0.4(51)]  200.15,126.67 90 bottom
JP78  [1X08_ROUND]  181.86,153.67 0 top
JP79  EDISON_CONNECTOR_FULLMOUNTING_HOLES  [EDISON_DAUGHTER]  234.44,114.3 0 bottom
JP80  EDISON_CONNECTOR_FULLHEADER  [DF40C-70DP-0.4(51)]  231.14,126.67 90 bottom
JP81  [1X08_ROUND]  212.85,153.67 0 top
JP82  EDISON_CONNECTOR_FULLMOUNTING_HOLES  [EDISON_DAUGHTER]  265.43,114.3 0 bottom
JP83  EDISON_CONNECTOR_FULLHEADER  [DF40C-70DP-0.4(51)]  262.13,126.67 90 bottom
JP84  [1X08_ROUND]  243.84,153.67 0 top
JP85  EDISON_CONNECTOR_FULLMOUNTING_HOLES  [EDISON_DAUGHTER]  172.47,159.26 0 bottom
JP86  EDISON_CONNECTOR_FULLHEADER  [DF40C-70DP-0.4(51)]  169.17,171.63 90 bottom
JP87  [1X08_ROUND]  150.88,198.63 0 top
JP88  EDISON_CONNECTOR_FULLMOUNTING_HOLES  [EDISON_DAUGHTER]  203.45,159.26 0 bottom
JP89  EDISON_CONNECTOR_FULLHEADER  [DF40C-70DP-0.4(51)]  200.15,171.63 90 bottom
JP90  [1X08_ROUND]  181.86,198.63 0 top
JP91  EDISON_CONNECTOR_FULLMOUNTING_HOLES  [EDISON_DAUGHTER]  234.44,159.26 0 bottom
JP92  EDISON_CONNECTOR_FULLHEADER  [DF40C-70DP-0.4(51)]  231.14,171.63 90 bottom
JP93  [1X08_ROUND]  212.85,198.63 0 top
JP94  EDISON_CONNECTOR_FULLMOUNTING_HOLES  [EDISON_DAUGHTER]  265.43,159.26 0 bottom
JP95  EDISON_CONNECTOR_FULLHEADER  [DF40C-70DP-0.4(51)]  262.13,171.63 90 bottom
JP96  [1X08_ROUND]  243.84,198.63 0 top
LOGO1  SFE_LOGO_NAME_FLAME.1_INCH  [SFE_LOGO_NAME_FLAME_.1]  16.13,7.11 0 top
LOGO2  OSHW-LOGOS  [OSHW-LOGO-S]  12.7,8.64 0 bottom
LOGO3  SFE_LOGO_NAME_FLAME.1_INCH  [SFE_LOGO_NAME_FLAME_.1]  27.94,7.11 0 bottom
LOGO4  OSHW-LOGOS  [OSHW-LOGO-S]  12.7,8.64 0 top
LOGO5  OSHW-LOGOS  [OSHW-LOGO-S]  43.69,8.64 0 bottom
LOGO6  SFE_LOGO_NAME_FLAME.1_INCH  [SFE_LOGO_NAME_FLAME_.1]  58.93,7.11 0 bottom
LOGO7  SFE_LOGO_NAME_FLAME.1_INCH  [SFE_LOGO_NAME_FLAME_.1]  47.12,7.11 0 top
LOGO8  OSHW-LOGOS  [OSHW-LOGO-S]  43.69,8.64 0 top
LOGO9  OSHW-LOGOS  [OSHW-LOGO-S]  74.68,8.64 0 bottom
LOGO10  SFE_LOGO_NAME_FLAME.1_INCH  [SFE_LOGO_NAME_FLAME_.1]  89.92,7.11 0 bottom
LOGO11  SFE_LOGO_NAME_FLAME.1_INCH  [SFE_LOGO_NAME_FLAME_.1]  78.11,7.11 0 top
LOGO12  OSHW-LOGOS  [OSHW-LOGO-S]  74.68,8.64 0 top
LOGO13  OSHW-LOGOS  [OSHW-LOGO-S]  105.66,8.64 0 bottom
LOGO14  SFE_LOGO_NAME_FLAME.1_INCH  [SFE_LOGO_NAME_FLAME_.1]  120.9,7.11 0 bottom
LOGO15  SFE_LOGO_NAME_FLAME.1_INCH  [SFE_LOGO_NAME_FLAME_.1]  109.09,7.11 0 top
LOGO16  OSHW-LOGOS  [OSHW-LOGO-S]  105.66,8.64 0 top
LOGO17  OSHW-LOGOS  [OSHW-LOGO-S]  12.7,53.59 0 bottom
LOGO18  SFE_LOGO_NAME_FLAME.1_INCH  [SFE_LOGO_NAME_FLAME_.1]  27.94,52.07 0 bottom
LOGO19  SFE_LOGO_NAME_FLAME.1_INCH  [SFE_LOGO_NAME_FLAME_.1]  16.13,52.07 0 top
LOGO20  OSHW-LOGOS  [OSHW-LOGO-S]  12.7,53.59 0 top
LOGO21  OSHW-LOGOS  [OSHW-LOGO-S]  43.69,53.59 0 bottom
LOGO22  SFE_LOGO_NAME_FLAME.1_INCH  [SFE_LOGO_NAME_FLAME_.1]  58.93,52.07 0 bottom
LOGO23  SFE_LOGO_NAME_FLAME.1_INCH  [SFE_LOGO_NAME_FLAME_.1]  47.12,52.07 0 top
LOGO24  OSHW-LOGOS  [OSHW-LOGO-S]  43.69,53.59 0 top
LOGO25  OSHW-LOGOS  [OSHW-LOGO-S]  74.68,53.59 0 bottom
LOGO26  SFE_LOGO_NAME_FLAME.1_INCH  [SFE_LOGO_NAME_FLAME_.1]  89.92,52.07 0 bottom
LOGO27  SFE_LOGO_NAME_FLAME.1_INCH  [SFE_LOGO_NAME_FLAME_.1]  78.11,52.07 0 top
LOGO28  OSHW-LOGOS  [OSHW-LOGO-S]  74.68,53.59 0 top
LOGO29  OSHW-LOGOS  [OSHW-LOGO-S]  105.66,53.59 0 bottom
LOGO30  SFE_LOGO_NAME_FLAME.1_INCH  [SFE_LOGO_NAME_FLAME_.1]  120.9,52.07 0 bottom
LOGO31  SFE_LOGO_NAME_FLAME.1_INCH  [SFE_LOGO_NAME_FLAME_.1]  109.09,52.07 0 top
LOGO32  OSHW-LOGOS  [OSHW-LOGO-S]  105.66,53.59 0 top
LOGO33  OSHW-LOGOS  [OSHW-LOGO-S]  150.37,8.64 0 bottom
LOGO34  SFE_LOGO_NAME_FLAME.1_INCH  [SFE_LOGO_NAME_FLAME_.1]  165.61,7.11 0 bottom
LOGO35  SFE_LOGO_NAME_FLAME.1_INCH  [SFE_LOGO_NAME_FLAME_.1]  153.8,7.11 0 top
LOGO36  OSHW-LOGOS  [OSHW-LOGO-S]  150.37,8.64 0 top
LOGO37  OSHW-LOGOS  [OSHW-LOGO-S]  181.36,8.64 0 bottom
LOGO38  SFE_LOGO_NAME_FLAME.1_INCH  [SFE_LOGO_NAME_FLAME_.1]  196.6,7.11 0 bottom
LOGO39  SFE_LOGO_NAME_FLAME.1_INCH  [SFE_LOGO_NAME_FLAME_.1]  184.78,7.11 0 top
LOGO40  OSHW-LOGOS  [OSHW-LOGO-S]  181.36,8.64 0 top
LOGO41  OSHW-LOGOS  [OSHW-LOGO-S]  212.34,8.64 0 bottom
LOGO42  SFE_LOGO_NAME_FLAME.1_INCH  [SFE_LOGO_NAME_FLAME_.1]  227.58,7.11 0 bottom
LOGO43  SFE_LOGO_NAME_FLAME.1_INCH  [SFE_LOGO_NAME_FLAME_.1]  215.77,7.11 0 top
LOGO44  OSHW-LOGOS  [OSHW-LOGO-S]  212.34,8.64 0 top
LOGO45  OSHW-LOGOS  [OSHW-LOGO-S]  243.33,8.64 0 bottom
LOGO46  SFE_LOGO_NAME_FLAME.1_INCH  [SFE_LOGO_NAME_FLAME_.1]  258.57,7.11 0 bottom
LOGO47  SFE_LOGO_NAME_FLAME.1_INCH  [SFE_LOGO_NAME_FLAME_.1]  246.76,7.11 0 top
LOGO48  OSHW-LOGOS  [OSHW-LOGO-S]  243.33,8.64 0 top
LOGO49  OSHW-LOGOS  [OSHW-LOGO-S]  150.37,53.59 0 bottom
LOGO50  SFE_LOGO_NAME_FLAME.1_INCH  [SFE_LOGO_NAME_FLAME_.1]  165.61,52.07 0 bottom
LOGO51  SFE_LOGO_NAME_FLAME.1_INCH  [SFE_LOGO_NAME_FLAME_.1]  153.8,52.07 0 top
LOGO52  OSHW-LOGOS  [OSHW-LOGO-S]  150.37,53.59 0 top
LOGO53  OSHW-LOGOS  [OSHW-LOGO-S]  181.36,53.59 0 bottom
LOGO54  SFE_LOGO_NAME_FLAME.1_INCH  [SFE_LOGO_NAME_FLAME_.1]  196.6,52.07 0 bottom
LOGO55  SFE_LOGO_NAME_FLAME.1_INCH  [SFE_LOGO_NAME_FLAME_.1]  184.78,52.07 0 top
LOGO56  OSHW-LOGOS  [OSHW-LOGO-S]  181.36,53.59 0 top
LOGO57  OSHW-LOGOS  [OSHW-LOGO-S]  212.34,53.59 0 bottom
LOGO58  SFE_LOGO_NAME_FLAME.1_INCH  [SFE_LOGO_NAME_FLAME_.1]  227.58,52.07 0 bottom
LOGO59  SFE_LOGO_NAME_FLAME.1_INCH  [SFE_LOGO_NAME_FLAME_.1]  215.77,52.07 0 top
LOGO60  OSHW-LOGOS  [OSHW-LOGO-S]  212.34,53.59 0 top
LOGO61  OSHW-LOGOS  [OSHW-LOGO-S]  243.33,53.59 0 bottom
LOGO62  SFE_LOGO_NAME_FLAME.1_INCH  [SFE_LOGO_NAME_FLAME_.1]  258.57,52.07 0 bottom
LOGO63  SFE_LOGO_NAME_FLAME.1_INCH  [SFE_LOGO_NAME_FLAME_.1]  246.76,52.07 0 top
LOGO64  OSHW-LOGOS  [OSHW-LOGO-S]  243.33,53.59 0 top
LOGO65  OSHW-LOGOS  [OSHW-LOGO-S]  12.7,112.27 0 bottom
LOGO66  SFE_LOGO_NAME_FLAME.1_INCH  [SFE_LOGO_NAME_FLAME_.1]  27.94,110.74 0 bottom
LOGO67  SFE_LOGO_NAME_FLAME.1_INCH  [SFE_LOGO_NAME_FLAME_.1]  16.13,110.74 0 top
LOGO68  OSHW-LOGOS  [OSHW-LOGO-S]  12.7,112.27 0 top
LOGO69  OSHW-LOGOS  [OSHW-LOGO-S]  43.69,112.27 0 bottom
LOGO70  SFE_LOGO_NAME_FLAME.1_INCH  [SFE_LOGO_NAME_FLAME_.1]  58.93,110.74 0 bottom
LOGO71  SFE_LOGO_NAME_FLAME.1_INCH  [SFE_LOGO_NAME_FLAME_.1]  47.12,110.74 0 top
LOGO72  OSHW-LOGOS  [OSHW-LOGO-S]  43.69,112.27 0 top
LOGO73  OSHW-LOGOS  [OSHW-LOGO-S]  74.68,112.27 0 bottom
LOGO74  SFE_LOGO_NAME_FLAME.1_INCH  [SFE_LOGO_NAME_FLAME_.1]  89.92,110.74 0 bottom
LOGO75  SFE_LOGO_NAME_FLAME.1_INCH  [SFE_LOGO_NAME_FLAME_.1]  78.11,110.74 0 top
LOGO76  OSHW-LOGOS  [OSHW-LOGO-S]  74.68,112.27 0 top
LOGO77  OSHW-LOGOS  [OSHW-LOGO-S]  105.66,112.27 0 bottom
LOGO78  SFE_LOGO_NAME_FLAME.1_INCH  [SFE_LOGO_NAME_FLAME_.1]  120.9,110.74 0 bottom
LOGO79  SFE_LOGO_NAME_FLAME.1_INCH  [SFE_LOGO_NAME_FLAME_.1]  109.09,110.74 0 top
LOGO80  OSHW-LOGOS  [OSHW-LOGO-S]  105.66,112.27 0 top
LOGO81  OSHW-LOGOS  [OSHW-LOGO-S]  12.7,157.23 0 bottom
LOGO82  SFE_LOGO_NAME_FLAME.1_INCH  [SFE_LOGO_NAME_FLAME_.1]  27.94,155.7 0 bottom
LOGO83  SFE_LOGO_NAME_FLAME.1_INCH  [SFE_LOGO_NAME_FLAME_.1]  16.13,155.7 0 top
LOGO84  OSHW-LOGOS  [OSHW-LOGO-S]  12.7,157.23 0 top
LOGO85  OSHW-LOGOS  [OSHW-LOGO-S]  43.69,157.23 0 bottom
LOGO86  SFE_LOGO_NAME_FLAME.1_INCH  [SFE_LOGO_NAME_FLAME_.1]  58.93,155.7 0 bottom
LOGO87  SFE_LOGO_NAME_FLAME.1_INCH  [SFE_LOGO_NAME_FLAME_.1]  47.12,155.7 0 top
LOGO88  OSHW-LOGOS  [OSHW-LOGO-S]  43.69,157.23 0 top
LOGO89  OSHW-LOGOS  [OSHW-LOGO-S]  74.68,157.23 0 bottom
LOGO90  SFE_LOGO_NAME_FLAME.1_INCH  [SFE_LOGO_NAME_FLAME_.1]  89.92,155.7 0 bottom
LOGO91  SFE_LOGO_NAME_FLAME.1_INCH  [SFE_LOGO_NAME_FLAME_.1]  78.11,155.7 0 top
LOGO92  OSHW-LOGOS  [OSHW-LOGO-S]  74.68,157.23 0 top
LOGO93  OSHW-LOGOS  [OSHW-LOGO-S]  105.66,157.23 0 bottom
LOGO94  SFE_LOGO_NAME_FLAME.1_INCH  [SFE_LOGO_NAME_FLAME_.1]  120.9,155.7 0 bottom
LOGO95  SFE_LOGO_NAME_FLAME.1_INCH  [SFE_LOGO_NAME_FLAME_.1]  109.09,155.7 0 top
LOGO96  OSHW-LOGOS  [OSHW-LOGO-S]  105.66,157.23 0 top
LOGO97  OSHW-LOGOS  [OSHW-LOGO-S]  150.37,112.27 0 bottom
LOGO98  SFE_LOGO_NAME_FLAME.1_INCH  [SFE_LOGO_NAME_FLAME_.1]  165.61,110.74 0 bottom
LOGO99  SFE_LOGO_NAME_FLAME.1_INCH  [SFE_LOGO_NAME_FLAME_.1]  153.8,110.74 0 top
LOGO100  OSHW-LOGOS  [OSHW-LOGO-S]  150.37,112.27 0 top
LOGO101  OSHW-LOGOS  [OSHW-LOGO-S]  181.36,112.27 0 bottom
LOGO102  SFE_LOGO_NAME_FLAME.1_INCH  [SFE_LOGO_NAME_FLAME_.1]  196.6,110.74 0 bottom
LOGO103  SFE_LOGO_NAME_FLAME.1_INCH  [SFE_LOGO_NAME_FLAME_.1]  184.78,110.74 0 top
LOGO104  OSHW-LOGOS  [OSHW-LOGO-S]  181.36,112.27 0 top
LOGO105  OSHW-LOGOS  [OSHW-LOGO-S]  212.34,112.27 0 bottom
LOGO106  SFE_LOGO_NAME_FLAME.1_INCH  [SFE_LOGO_NAME_FLAME_.1]  227.58,110.74 0 bottom
LOGO107  SFE_LOGO_NAME_FLAME.1_INCH  [SFE_LOGO_NAME_FLAME_.1]  215.77,110.74 0 top
LOGO108  OSHW-LOGOS  [OSHW-LOGO-S]  212.34,112.27 0 top
LOGO109  OSHW-LOGOS  [OSHW-LOGO-S]  243.33,112.27 0 bottom
LOGO110  SFE_LOGO_NAME_FLAME.1_INCH  [SFE_LOGO_NAME_FLAME_.1]  258.57,110.74 0 bottom
LOGO111  SFE_LOGO_NAME_FLAME.1_INCH  [SFE_LOGO_NAME_FLAME_.1]  246.76,110.74 0 top
LOGO112  OSHW-LOGOS  [OSHW-LOGO-S]  243.33,112.27 0 top
LOGO113  OSHW-LOGOS  [OSHW-LOGO-S]  150.37,157.23 0 bottom
LOGO114  SFE_LOGO_NAME_FLAME.1_INCH  [SFE_LOGO_NAME_FLAME_.1]  165.61,155.7 0 bottom
LOGO115  SFE_LOGO_NAME_FLAME.1_INCH  [SFE_LOGO_NAME_FLAME_.1]  153.8,155.7 0 top
LOGO116  OSHW-LOGOS  [OSHW-LOGO-S]  150.37,157.23 0 top
LOGO117  OSHW-LOGOS  [OSHW-LOGO-S]  181.36,157.23 0 bottom
LOGO118  SFE_LOGO_NAME_FLAME.1_INCH  [SFE_LOGO_NAME_FLAME_.1]  196.6,155.7 0 bottom
LOGO119  SFE_LOGO_NAME_FLAME.1_INCH  [SFE_LOGO_NAME_FLAME_.1]  184.78,155.7 0 top
LOGO120  OSHW-LOGOS  [OSHW-LOGO-S]  181.36,157.23 0 top
LOGO121  OSHW-LOGOS  [OSHW-LOGO-S]  212.34,157.23 0 bottom
LOGO122  SFE_LOGO_NAME_FLAME.1_INCH  [SFE_LOGO_NAME_FLAME_.1]  227.58,155.7 0 bottom
LOGO123  SFE_LOGO_NAME_FLAME.1_INCH  [SFE_LOGO_NAME_FLAME_.1]  215.77,155.7 0 top
LOGO124  OSHW-LOGOS  [OSHW-LOGO-S]  212.34,157.23 0 top
LOGO125  OSHW-LOGOS  [OSHW-LOGO-S]  243.33,157.23 0 bottom
LOGO126  SFE_LOGO_NAME_FLAME.1_INCH  [SFE_LOGO_NAME_FLAME_.1]  258.57,155.7 0 bottom
LOGO127  SFE_LOGO_NAME_FLAME.1_INCH  [SFE_LOGO_NAME_FLAME_.1]  246.76,155.7 0 top
LOGO128  OSHW-LOGOS  [OSHW-LOGO-S]  243.33,157.23 0 top
R1  10K  [0603-RES]  22.1,25.91 0 top
R2  10K  [0603-RES]  18.29,25.91 180 top
R3  200k  [0603-RES]  17.02,22.1 180 top
R4  DNP  [0603-RES]  19.56,17.65 180 top
R5  DNP  [0603-RES]  19.56,16.38 180 top
R6  2.2k  [0603-RES]  11.94,24.64 90 top
R7  10K  [0603-RES]  53.09,25.91 0 top
R8  10K  [0603-RES]  49.28,25.91 180 top
R9  200k  [0603-RES]  48.01,22.1 180 top
R10  DNP  [0603-RES]  50.55,17.65 180 top
R11  DNP  [0603-RES]  50.55,16.38 180 top
R12  2.2k  [0603-RES]  42.93,24.64 90 top
R13  10K  [0603-RES]  84.07,25.91 0 top
R14  10K  [0603-RES]  80.26,25.91 180 top
R15  200k  [0603-RES]  78.99,22.1 180 top
R16  DNP  [0603-RES]  81.53,17.65 180 top
R17  DNP  [0603-RES]  81.53,16.38 180 top
R18  2.2k  [0603-RES]  73.91,24.64 90 top
R19  10K  [0603-RES]  115.06,25.91 0 top
R20  10K  [0603-RES]  111.25,25.91 180 top
R21  200k  [0603-RES]  109.98,22.1 180 top
R22  DNP  [0603-RES]  112.52,17.65 180 top
R23  DNP  [0603-RES]  112.52,16.38 180 top
R24  2.2k  [0603-RES]  104.9,24.64 90 top
R25  10K  [0603-RES]  22.1,70.87 0 top
R26  10K  [0603-RES]  18.29,70.87 180 top
R27  200k  [0603-RES]  17.02,67.06 180 top
R28  DNP  [0603-RES]  19.56,62.61 180 top
R29  DNP  [0603-RES]  19.56,61.34 180 top
R30  2.2k  [0603-RES]  11.94,69.6 90 top
R31  10K  [0603-RES]  53.09,70.87 0 top
R32  10K  [0603-RES]  49.28,70.87 180 top
R33  200k  [0603-RES]  48.01,67.06 180 top
R34  DNP  [0603-RES]  50.55,62.61 180 top
R35  DNP  [0603-RES]  50.55,61.34 180 top
R36  2.2k  [0603-RES]  42.93,69.6 90 top
R37  10K  [0603-RES]  84.07,70.87 0 top
R38  10K  [0603-RES]  80.26,70.87 180 top
R39  200k  [0603-RES]  78.99,67.06 180 top
R40  DNP  [0603-RES]  81.53,62.61 180 top
R41  DNP  [0603-RES]  81.53,61.34 180 top
R42  2.2k  [0603-RES]  73.91,69.6 90 top
R43  10K  [0603-RES]  115.06,70.87 0 top
R44  10K  [0603-RES]  111.25,70.87 180 top
R45  200k  [0603-RES]  109.98,67.06 180 top
R46  DNP  [0603-RES]  112.52,62.61 180 top
R47  DNP  [0603-RES]  112.52,61.34 180 top
R48  2.2k  [0603-RES]  104.9,69.6 90 top
R49  10K  [0603-RES]  159.77,25.91 0 top
R50  10K  [0603-RES]  155.96,25.91 180 top
R51  200k  [0603-RES]  154.69,22.1 180 top
R52  DNP  [0603-RES]  157.23,17.65 180 top
R53  DNP  [0603-RES]  157.23,16.38 180 top
R54  2.2k  [0603-RES]  149.61,24.64 90 top
R55  10K  [0603-RES]  190.75,25.91 0 top
R56  10K  [0603-RES]  186.94,25.91 180 top
R57  200k  [0603-RES]  185.67,22.1 180 top
R58  DNP  [0603-RES]  188.21,17.65 180 top
R59  DNP  [0603-RES]  188.21,16.38 180 top
R60  2.2k  [0603-RES]  180.59,24.64 90 top
R61  10K  [0603-RES]  221.74,25.91 0 top
R62  10K  [0603-RES]  217.93,25.91 180 top
R63  200k  [0603-RES]  216.66,22.1 180 top
R64  DNP  [0603-RES]  219.2,17.65 180 top
R65  DNP  [0603-RES]  219.2,16.38 180 top
R66  2.2k  [0603-RES]  211.58,24.64 90 top
R67  10K  [0603-RES]  252.73,25.91 0 top
R68  10K  [0603-RES]  248.92,25.91 180 top
R69  200k  [0603-RES]  247.65,22.1 180 top
R70  DNP  [0603-RES]  250.19,17.65 180 top
R71  DNP  [0603-RES]  250.19,16.38 180 top
R72  2.2k  [0603-RES]  242.57,24.64 90 top
R73  10K  [0603-RES]  159.77,70.87 0 top
R74  10K  [0603-RES]  155.96,70.87 180 top
R75  200k  [0603-RES]  154.69,67.06 180 top
R76  DNP  [0603-RES]  157.23,62.61 180 top
R77  DNP  [0603-RES]  157.23,61.34 180 top
R78  2.2k  [0603-RES]  149.61,69.6 90 top
R79  10K  [0603-RES]  190.75,70.87 0 top
R80  10K  [0603-RES]  186.94,70.87 180 top
R81  200k  [0603-RES]  185.67,67.06 180 top
R82  DNP  [0603-RES]  188.21,62.61 180 top
R83  DNP  [0603-RES]  188.21,61.34 180 top
R84  2.2k  [0603-RES]  180.59,69.6 90 top
R85  10K  [0603-RES]  221.74,70.87 0 top
R86  10K  [0603-RES]  217.93,70.87 180 top
R87  200k  [0603-RES]  216.66,67.06 180 top
R88  DNP  [0603-RES]  219.2,62.61 180 top
R89  DNP  [0603-RES]  219.2,61.34 180 top
R90  2.2k  [0603-RES]  211.58,69.6 90 top
R91  10K  [0603-RES]  252.73,70.87 0 top
R92  10K  [0603-RES]  248.92,70.87 180 top
R93  200k  [0603-RES]  247.65,67.06 180 top
R94  DNP  [0603-RES]  250.19,62.61 180 top
R95  DNP  [0603-RES]  250.19,61.34 180 top
R96  2.2k  [0603-RES]  242.57,69.6 90 top
R97  10K  [0603-RES]  22.1,129.54 0 top
R98  10K  [0603-RES]  18.29,129.54 180 top
R99  200k  [0603-RES]  17.02,125.73 180 top
R100  DNP  [0603-RES]  19.56,121.28 180 top
R101  DNP  [0603-RES]  19.56,120.02 180 top
R102  2.2k  [0603-RES]  11.94,128.27 90 top
R103  10K  [0603-RES]  53.09,129.54 0 top
R104  10K  [0603-RES]  49.28,129.54 180 top
R105  200k  [0603-RES]  48.01,125.73 180 top
R106  DNP  [0603-RES]  50.55,121.28 180 top
R107  DNP  [0603-RES]  50.55,120.02 180 top
R108  2.2k  [0603-RES]  42.93,128.27 90 top
R109  10K  [0603-RES]  84.07,129.54 0 top
R110  10K  [0603-RES]  80.26,129.54 180 top
R111  200k  [0603-RES]  78.99,125.73 180 top
R112  DNP  [0603-RES]  81.53,121.28 180 top
R113  DNP  [0603-RES]  81.53,120.02 180 top
R114  2.2k  [0603-RES]  73.91,128.27 90 top
R115  10K  [0603-RES]  115.06,129.54 0 top
R116  10K  [0603-RES]  111.25,129.54 180 top
R117  200k  [0603-RES]  109.98,125.73 180 top
R118  DNP  [0603-RES]  112.52,121.28 180 top
R119  DNP  [0603-RES]  112.52,120.02 180 top
R120  2.2k  [0603-RES]  104.9,128.27 90 top
R121  10K  [0603-RES]  22.1,174.5 0 top
R122  10K  [0603-RES]  18.29,174.5 180 top
R123  200k  [0603-RES]  17.02,170.69 180 top
R124  DNP  [0603-RES]  19.56,166.24 180 top
R125  DNP  [0603-RES]  19.56,164.97 180 top
R126  2.2k  [0603-RES]  11.94,173.23 90 top
R127  10K  [0603-RES]  53.09,174.5 0 top
R128  10K  [0603-RES]  49.28,174.5 180 top
R129  200k  [0603-RES]  48.01,170.69 180 top
R130  DNP  [0603-RES]  50.55,166.24 180 top
R131  DNP  [0603-RES]  50.55,164.97 180 top
R132  2.2k  [0603-RES]  42.93,173.23 90 top
R133  10K  [0603-RES]  84.07,174.5 0 top
R134  10K  [0603-RES]  80.26,174.5 180 top
R135  200k  [0603-RES]  78.99,170.69 180 top
R136  DNP  [0603-RES]  81.53,166.24 180 top
R137  DNP  [0603-RES]  81.53,164.97 180 top
R138  2.2k  [0603-RES]  73.91,173.23 90 top
R139  10K  [0603-RES]  115.06,174.5 0 top
R140  10K  [0603-RES]  111.25,174.5 180 top
R141  200k  [0603-RES]  109.98,170.69 180 top
R142  DNP  [0603-RES]  112.52,166.24 180 top
R143  DNP  [0603-RES]  112.52,164.97 180 top
R144  2.2k  [0603-RES]  104.9,173.23 90 top
R145  10K  [0603-RES]  159.77,129.54 0 top
R146  10K  [0603-RES]  155.96,129.54 180 top
R147  200k  [0603-RES]  154.69,125.73 180 top
R148  DNP  [0603-RES]  157.23,121.28 180 top
R149  DNP  [0603-RES]  157.23,120.02 180 top
R150  2.2k  [0603-RES]  149.61,128.27 90 top
R151  10K  [0603-RES]  190.75,129.54 0 top
R152  10K  [0603-RES]  186.94,129.54 180 top
R153  200k  [0603-RES]  185.67,125.73 180 top
R154  DNP  [0603-RES]  188.21,121.28 180 top
R155  DNP  [0603-RES]  188.21,120.02 180 top
R156  2.2k  [0603-RES]  180.59,128.27 90 top
R157  10K  [0603-RES]  221.74,129.54 0 top
R158  10K  [0603-RES]  217.93,129.54 180 top
R159  200k  [0603-RES]  216.66,125.73 180 top
R160  DNP  [0603-RES]  219.2,121.28 180 top
R161  DNP  [0603-RES]  219.2,120.02 180 top
R162  2.2k  [0603-RES]  211.58,128.27 90 top
R163  10K  [0603-RES]  252.73,129.54 0 top
R164  10K  [0603-RES]  248.92,129.54 180 top
R165  200k  [0603-RES]  247.65,125.73 180 top
R166  DNP  [0603-RES]  250.19,121.28 180 top
R167  DNP  [0603-RES]  250.19,120.02 180 top
R168  2.2k  [0603-RES]  242.57,128.27 90 top
R169  10K  [0603-RES]  159.77,174.5 0 top
R170  10K  [0603-RES]  155.96,174.5 180 top
R171  200k  [0603-RES]  154.69,170.69 180 top
R172  DNP  [0603-RES]  157.23,166.24 180 top
R173  DNP  [0603-RES]  157.23,164.97 180 top
R174  2.2k  [0603-RES]  149.61,173.23 90 top
R175  10K  [0603-RES]  190.75,174.5 0 top
R176  10K  [0603-RES]  186.94,174.5 180 top
R177  200k  [0603-RES]  185.67,170.69 180 top
R178  DNP  [0603-RES]  188.21,166.24 180 top
R179  DNP  [0603-RES]  188.21,164.97 180 top
R180  2.2k  [0603-RES]  180.59,173.23 90 top
R181  10K  [0603-RES]  221.74,174.5 0 top
R182  10K  [0603-RES]  217.93,174.5 180 top
R183  200k  [0603-RES]  216.66,170.69 180 top
R184  DNP  [0603-RES]  219.2,166.24 180 top
R185  DNP  [0603-RES]  219.2,164.97 180 top
R186  2.2k  [0603-RES]  211.58,173.23 90 top
R187  10K  [0603-RES]  252.73,174.5 0 top
R188  10K  [0603-RES]  248.92,174.5 180 top
R189  200k  [0603-RES]  247.65,170.69 180 top
R190  DNP  [0603-RES]  250.19,166.24 180 top
R191  DNP  [0603-RES]  250.19,164.97 180 top
R192  2.2k  [0603-RES]  242.57,173.23 90 top
SJ1  JUMPER-PAD-2-NC_BY_PASTE  [PAD-JUMPER-2-NC_BY_PASTE_YES_SILK]  13.21,30.99 0 top
SJ2  JUMPER-PAD-2-NOYES_SILK  [PAD-JUMPER-2-NO_YES_SILK]  15.75,30.99 0 top
SJ3  JUMPER-PAD-2-NOYES_SILK  [PAD-JUMPER-2-NO_YES_SILK]  18.29,30.99 0 top
SJ4  JUMPER-PAD-2-NOYES_SILK  [PAD-JUMPER-2-NO_YES_SILK]  20.83,30.99 0 top
SJ5  SDA_SEL  [PAD-JUMPER-3-2OF3_NC_BY_PASTE_YES_SILK_FULL_BOX]  23.5,15.62 180 top
SJ6  SCL_SEL  [PAD-JUMPER-3-2OF3_NC_BY_PASTE_YES_SILK_FULL_BOX]  23.5,17.78 180 top
SJ7  JUMPER-PAD-2-NC_BY_PASTE  [PAD-JUMPER-2-NC_BY_PASTE_YES_SILK]  44.2,30.99 0 top
SJ8  JUMPER-PAD-2-NOYES_SILK  [PAD-JUMPER-2-NO_YES_SILK]  46.74,30.99 0 top
SJ9  JUMPER-PAD-2-NOYES_SILK  [PAD-JUMPER-2-NO_YES_SILK]  49.28,30.99 0 top
SJ10  JUMPER-PAD-2-NOYES_SILK  [PAD-JUMPER-2-NO_YES_SILK]  51.82,30.99 0 top
SJ11  SDA_SEL  [PAD-JUMPER-3-2OF3_NC_BY_PASTE_YES_SILK_FULL_BOX]  54.48,15.62 180 top
SJ12  SCL_SEL  [PAD-JUMPER-3-2OF3_NC_BY_PASTE_YES_SILK_FULL_BOX]  54.48,17.78 180 top
SJ13  JUMPER-PAD-2-NC_BY_PASTE  [PAD-JUMPER-2-NC_BY_PASTE_YES_SILK]  75.18,30.99 0 top
SJ14  JUMPER-PAD-2-NOYES_SILK  [PAD-JUMPER-2-NO_YES_SILK]  77.72,30.99 0 top
SJ15  JUMPER-PAD-2-NOYES_SILK  [PAD-JUMPER-2-NO_YES_SILK]  80.26,30.99 0 top
SJ16  JUMPER-PAD-2-NOYES_SILK  [PAD-JUMPER-2-NO_YES_SILK]  82.8,30.99 0 top
SJ17  SDA_SEL  [PAD-JUMPER-3-2OF3_NC_BY_PASTE_YES_SILK_FULL_BOX]  85.47,15.62 180 top
SJ18  SCL_SEL  [PAD-JUMPER-3-2OF3_NC_BY_PASTE_YES_SILK_FULL_BOX]  85.47,17.78 180 top
SJ19  JUMPER-PAD-2-NC_BY_PASTE  [PAD-JUMPER-2-NC_BY_PASTE_YES_SILK]  106.17,30.99 0 top
SJ20  JUMPER-PAD-2-NOYES_SILK  [PAD-JUMPER-2-NO_YES_SILK]  108.71,30.99 0 top
SJ21  JUMPER-PAD-2-NOYES_SILK  [PAD-JUMPER-2-NO_YES_SILK]  111.25,30.99 0 top
SJ22  JUMPER-PAD-2-NOYES_SILK  [PAD-JUMPER-2-NO_YES_SILK]  113.79,30.99 0 top
SJ23  SDA_SEL  [PAD-JUMPER-3-2OF3_NC_BY_PASTE_YES_SILK_FULL_BOX]  116.46,15.62 180 top
SJ24  SCL_SEL  [PAD-JUMPER-3-2OF3_NC_BY_PASTE_YES_SILK_FULL_BOX]  116.46,17.78 180 top
SJ25  JUMPER-PAD-2-NC_BY_PASTE  [PAD-JUMPER-2-NC_BY_PASTE_YES_SILK]  13.21,75.95 0 top
SJ26  JUMPER-PAD-2-NOYES_SILK  [PAD-JUMPER-2-NO_YES_SILK]  15.75,75.95 0 top
SJ27  JUMPER-PAD-2-NOYES_SILK  [PAD-JUMPER-2-NO_YES_SILK]  18.29,75.95 0 top
SJ28  JUMPER-PAD-2-NOYES_SILK  [PAD-JUMPER-2-NO_YES_SILK]  20.83,75.95 0 top
SJ29  SDA_SEL  [PAD-JUMPER-3-2OF3_NC_BY_PASTE_YES_SILK_FULL_BOX]  23.5,60.58 180 top
SJ30  SCL_SEL  [PAD-JUMPER-3-2OF3_NC_BY_PASTE_YES_SILK_FULL_BOX]  23.5,62.74 180 top
SJ31  JUMPER-PAD-2-NC_BY_PASTE  [PAD-JUMPER-2-NC_BY_PASTE_YES_SILK]  44.2,75.95 0 top
SJ32  JUMPER-PAD-2-NOYES_SILK  [PAD-JUMPER-2-NO_YES_SILK]  46.74,75.95 0 top
SJ33  JUMPER-PAD-2-NOYES_SILK  [PAD-JUMPER-2-NO_YES_SILK]  49.28,75.95 0 top
SJ34  JUMPER-PAD-2-NOYES_SILK  [PAD-JUMPER-2-NO_YES_SILK]  51.82,75.95 0 top
SJ35  SDA_SEL  [PAD-JUMPER-3-2OF3_NC_BY_PASTE_YES_SILK_FULL_BOX]  54.48,60.58 180 top
SJ36  SCL_SEL  [PAD-JUMPER-3-2OF3_NC_BY_PASTE_YES_SILK_FULL_BOX]  54.48,62.74 180 top
SJ37  JUMPER-PAD-2-NC_BY_PASTE  [PAD-JUMPER-2-NC_BY_PASTE_YES_SILK]  75.18,75.95 0 top
SJ38  JUMPER-PAD-2-NOYES_SILK  [PAD-JUMPER-2-NO_YES_SILK]  77.72,75.95 0 top
SJ39  JUMPER-PAD-2-NOYES_SILK  [PAD-JUMPER-2-NO_YES_SILK]  80.26,75.95 0 top
SJ40  JUMPER-PAD-2-NOYES_SILK  [PAD-JUMPER-2-NO_YES_SILK]  82.8,75.95 0 top
SJ41  SDA_SEL  [PAD-JUMPER-3-2OF3_NC_BY_PASTE_YES_SILK_FULL_BOX]  85.47,60.58 180 top
SJ42  SCL_SEL  [PAD-JUMPER-3-2OF3_NC_BY_PASTE_YES_SILK_FULL_BOX]  85.47,62.74 180 top
SJ43  JUMPER-PAD-2-NC_BY_PASTE  [PAD-JUMPER-2-NC_BY_PASTE_YES_SILK]  106.17,75.95 0 top
SJ44  JUMPER-PAD-2-NOYES_SILK  [PAD-JUMPER-2-NO_YES_SILK]  108.71,75.95 0 top
SJ45  JUMPER-PAD-2-NOYES_SILK  [PAD-JUMPER-2-NO_YES_SILK]  111.25,75.95 0 top
SJ46  JUMPER-PAD-2-NOYES_SILK  [PAD-JUMPER-2-NO_YES_SILK]  113.79,75.95 0 top
SJ47  SDA_SEL  [PAD-JUMPER-3-2OF3_NC_BY_PASTE_YES_SILK_FULL_BOX]  116.46,60.58 180 top
SJ48  SCL_SEL  [PAD-JUMPER-3-2OF3_NC_BY_PASTE_YES_SILK_FULL_BOX]  116.46,62.74 180 top
SJ49  JUMPER-PAD-2-NC_BY_PASTE  [PAD-JUMPER-2-NC_BY_PASTE_YES_SILK]  150.88,30.99 0 top
SJ50  JUMPER-PAD-2-NOYES_SILK  [PAD-JUMPER-2-NO_YES_SILK]  153.42,30.99 0 top
SJ51  JUMPER-PAD-2-NOYES_SILK  [PAD-JUMPER-2-NO_YES_SILK]  155.96,30.99 0 top
SJ52  JUMPER-PAD-2-NOYES_SILK  [PAD-JUMPER-2-NO_YES_SILK]  158.5,30.99 0 top
SJ53  SDA_SEL  [PAD-JUMPER-3-2OF3_NC_BY_PASTE_YES_SILK_FULL_BOX]  161.16,15.62 180 top
SJ54  SCL_SEL  [PAD-JUMPER-3-2OF3_NC_BY_PASTE_YES_SILK_FULL_BOX]  161.16,17.78 180 top
SJ55  JUMPER-PAD-2-NC_BY_PASTE  [PAD-JUMPER-2-NC_BY_PASTE_YES_SILK]  181.86,30.99 0 top
SJ56  JUMPER-PAD-2-NOYES_SILK  [PAD-JUMPER-2-NO_YES_SILK]  184.4,30.99 0 top
SJ57  JUMPER-PAD-2-NOYES_SILK  [PAD-JUMPER-2-NO_YES_SILK]  186.94,30.99 0 top
SJ58  JUMPER-PAD-2-NOYES_SILK  [PAD-JUMPER-2-NO_YES_SILK]  189.48,30.99 0 top
SJ59  SDA_SEL  [PAD-JUMPER-3-2OF3_NC_BY_PASTE_YES_SILK_FULL_BOX]  192.15,15.62 180 top
SJ60  SCL_SEL  [PAD-JUMPER-3-2OF3_NC_BY_PASTE_YES_SILK_FULL_BOX]  192.15,17.78 180 top
SJ61  JUMPER-PAD-2-NC_BY_PASTE  [PAD-JUMPER-2-NC_BY_PASTE_YES_SILK]  212.85,30.99 0 top
SJ62  JUMPER-PAD-2-NOYES_SILK  [PAD-JUMPER-2-NO_YES_SILK]  215.39,30.99 0 top
SJ63  JUMPER-PAD-2-NOYES_SILK  [PAD-JUMPER-2-NO_YES_SILK]  217.93,30.99 0 top
SJ64  JUMPER-PAD-2-NOYES_SILK  [PAD-JUMPER-2-NO_YES_SILK]  220.47,30.99 0 top
SJ65  SDA_SEL  [PAD-JUMPER-3-2OF3_NC_BY_PASTE_YES_SILK_FULL_BOX]  223.14,15.62 180 top
SJ66  SCL_SEL  [PAD-JUMPER-3-2OF3_NC_BY_PASTE_YES_SILK_FULL_BOX]  223.14,17.78 180 top
SJ67  JUMPER-PAD-2-NC_BY_PASTE  [PAD-JUMPER-2-NC_BY_PASTE_YES_SILK]  243.84,30.99 0 top
SJ68  JUMPER-PAD-2-NOYES_SILK  [PAD-JUMPER-2-NO_YES_SILK]  246.38,30.99 0 top